# Altium PCB PCB.PcbDoc (part 1 of 2)
Units mm, origin at the board's own origin, x right, y up, seen from the top; angles counter-clockwise.
Board outline 99.99 x 64.99 mm, 4 copper layers (Top Layer 1, Top Layer, Bottom Layer, Bottom Layer 1), stack 1.483 mm thick; 158 components, 106 nets, 655 pads, 492 vias.
Unrouted connection lines stored in the file: 12.
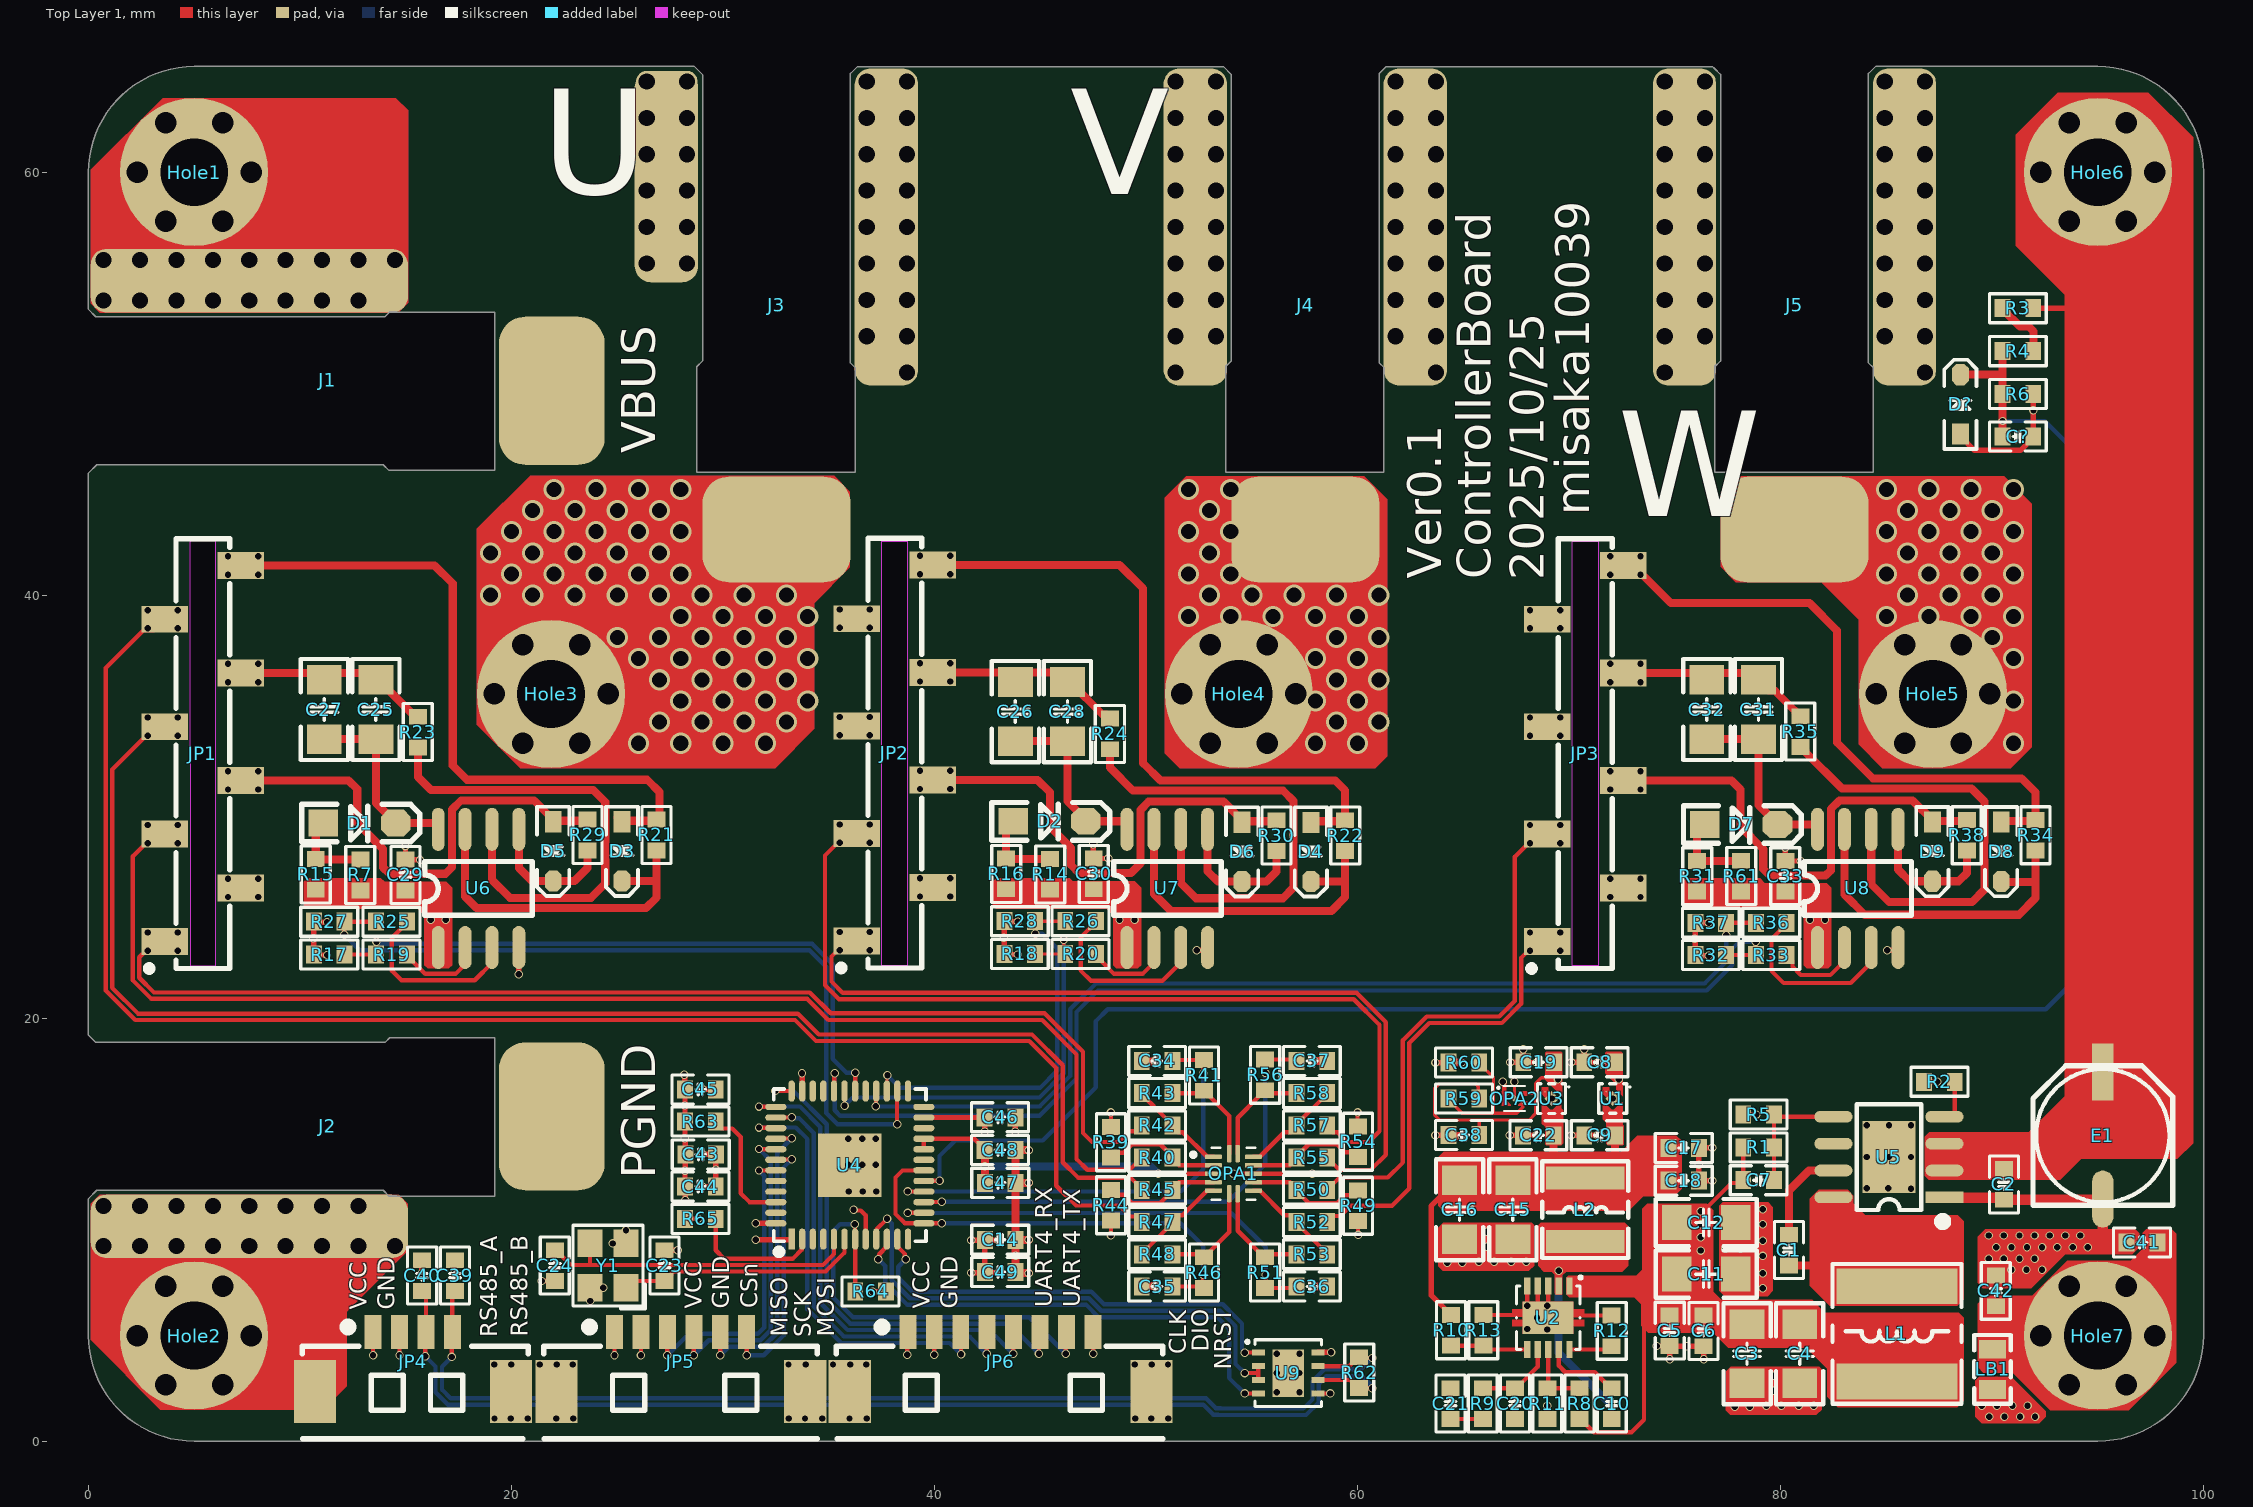
[diagram p0: Top Layer 1 view]
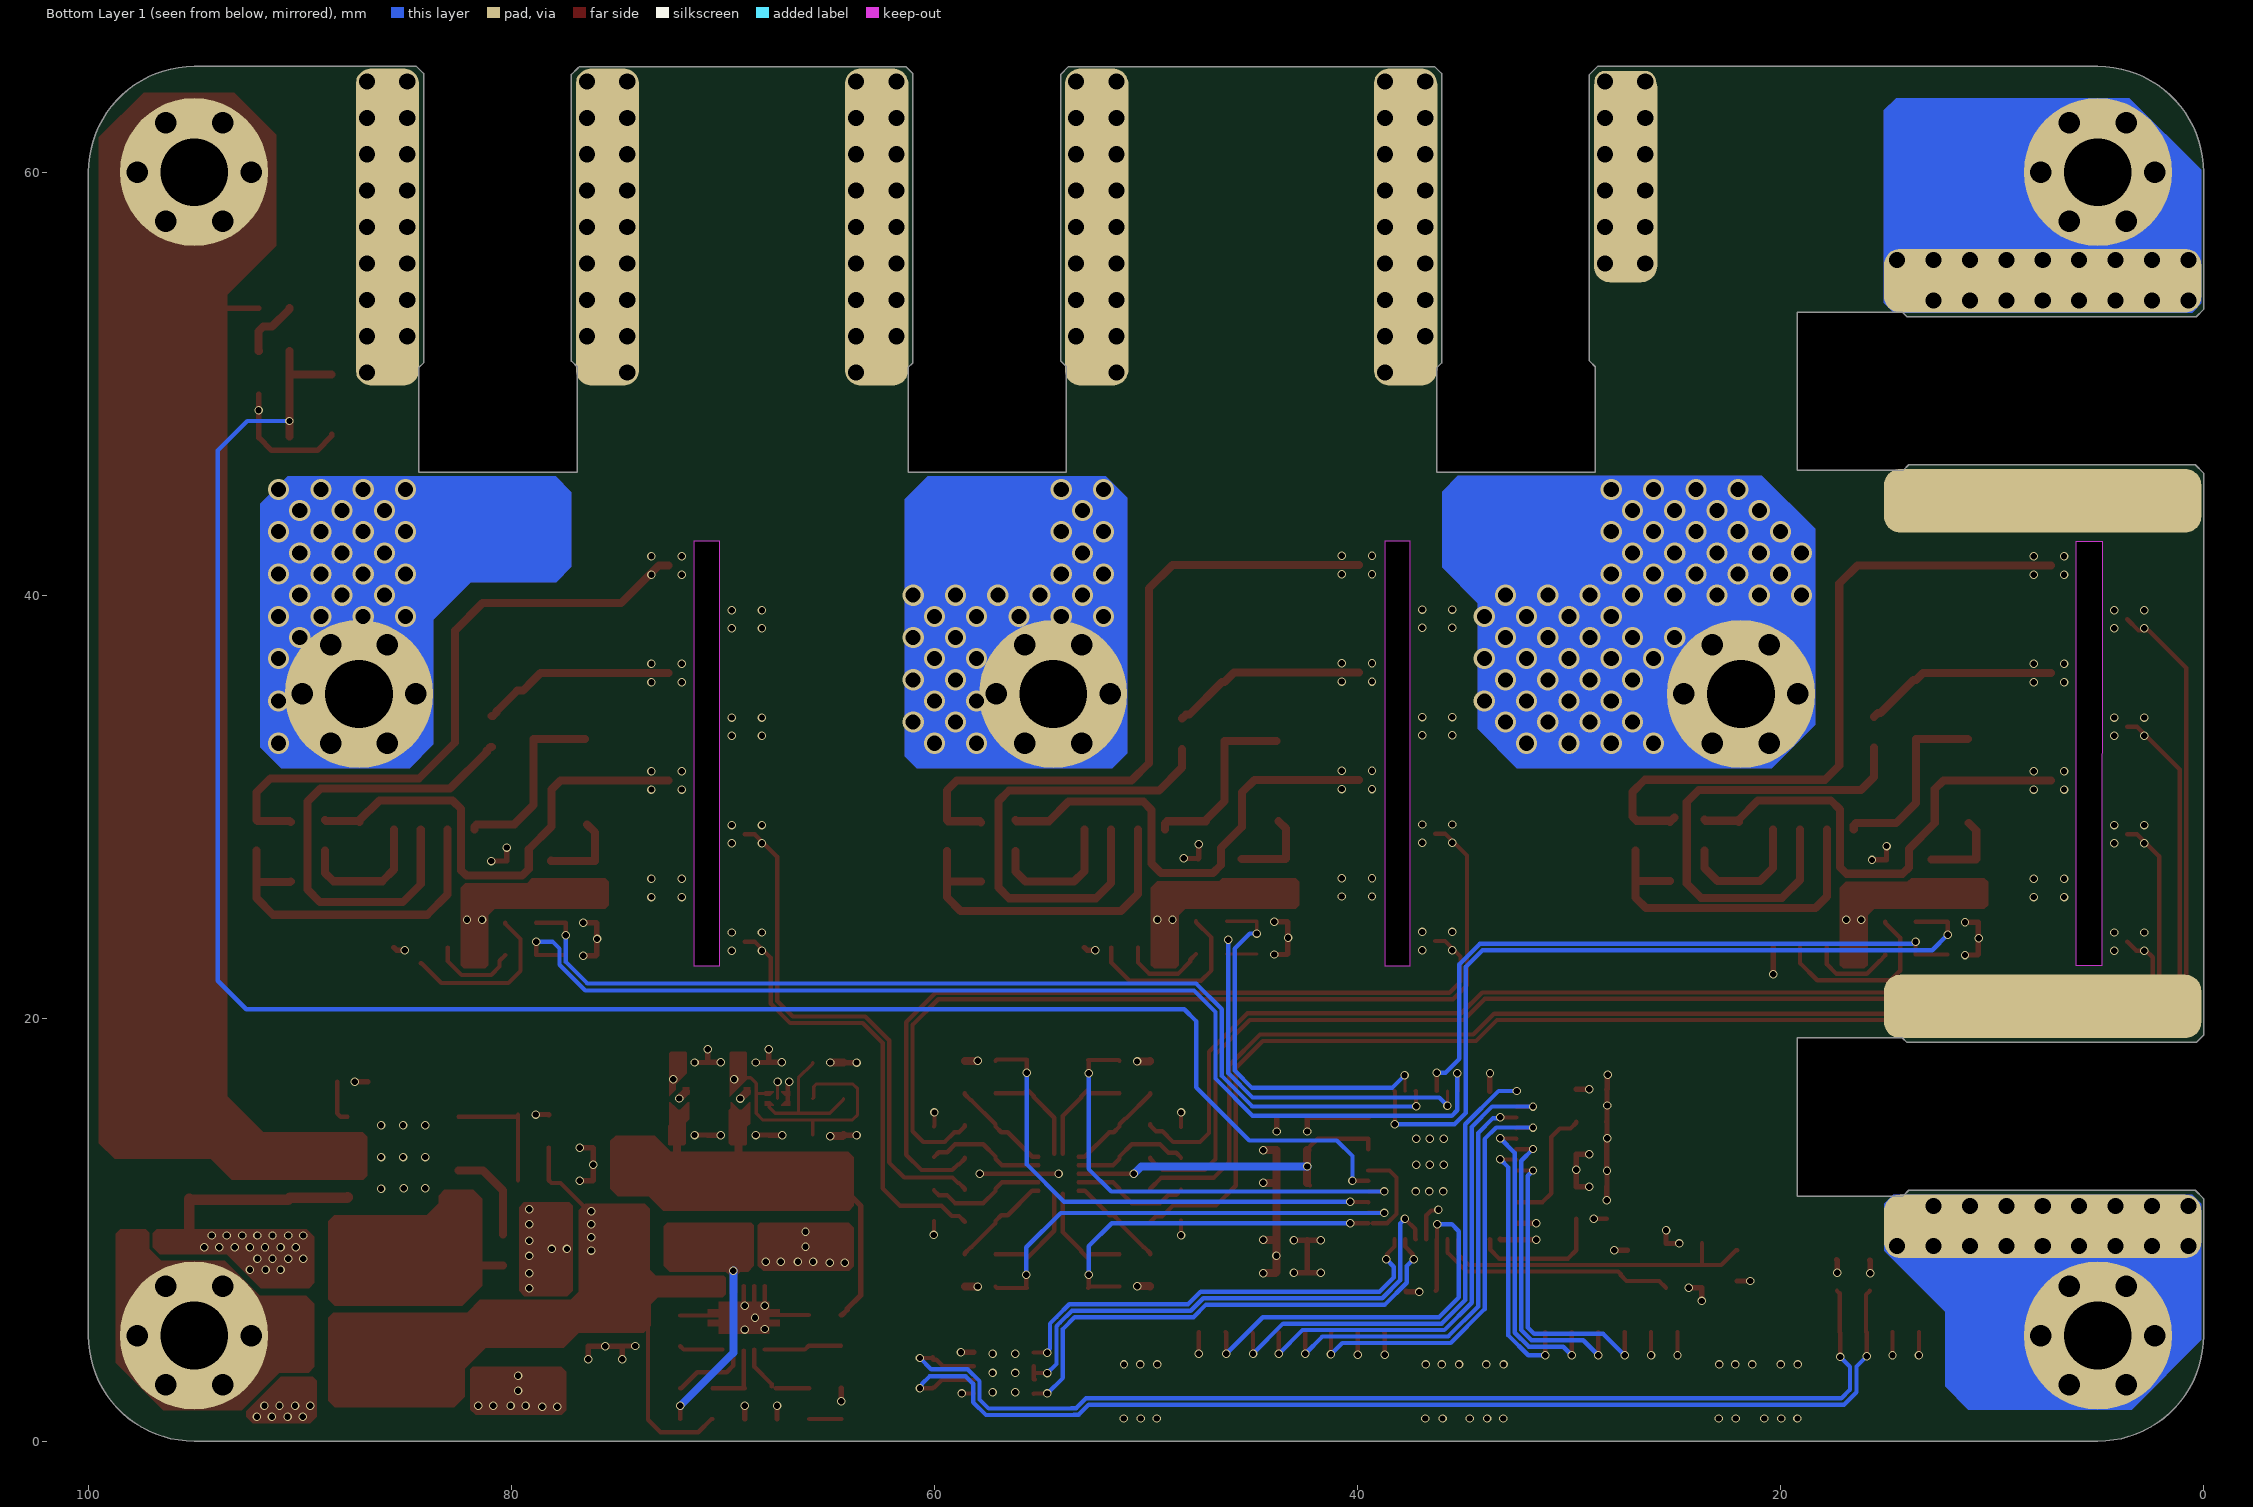
[diagram p1: Bottom Layer 1 view, seen from below]
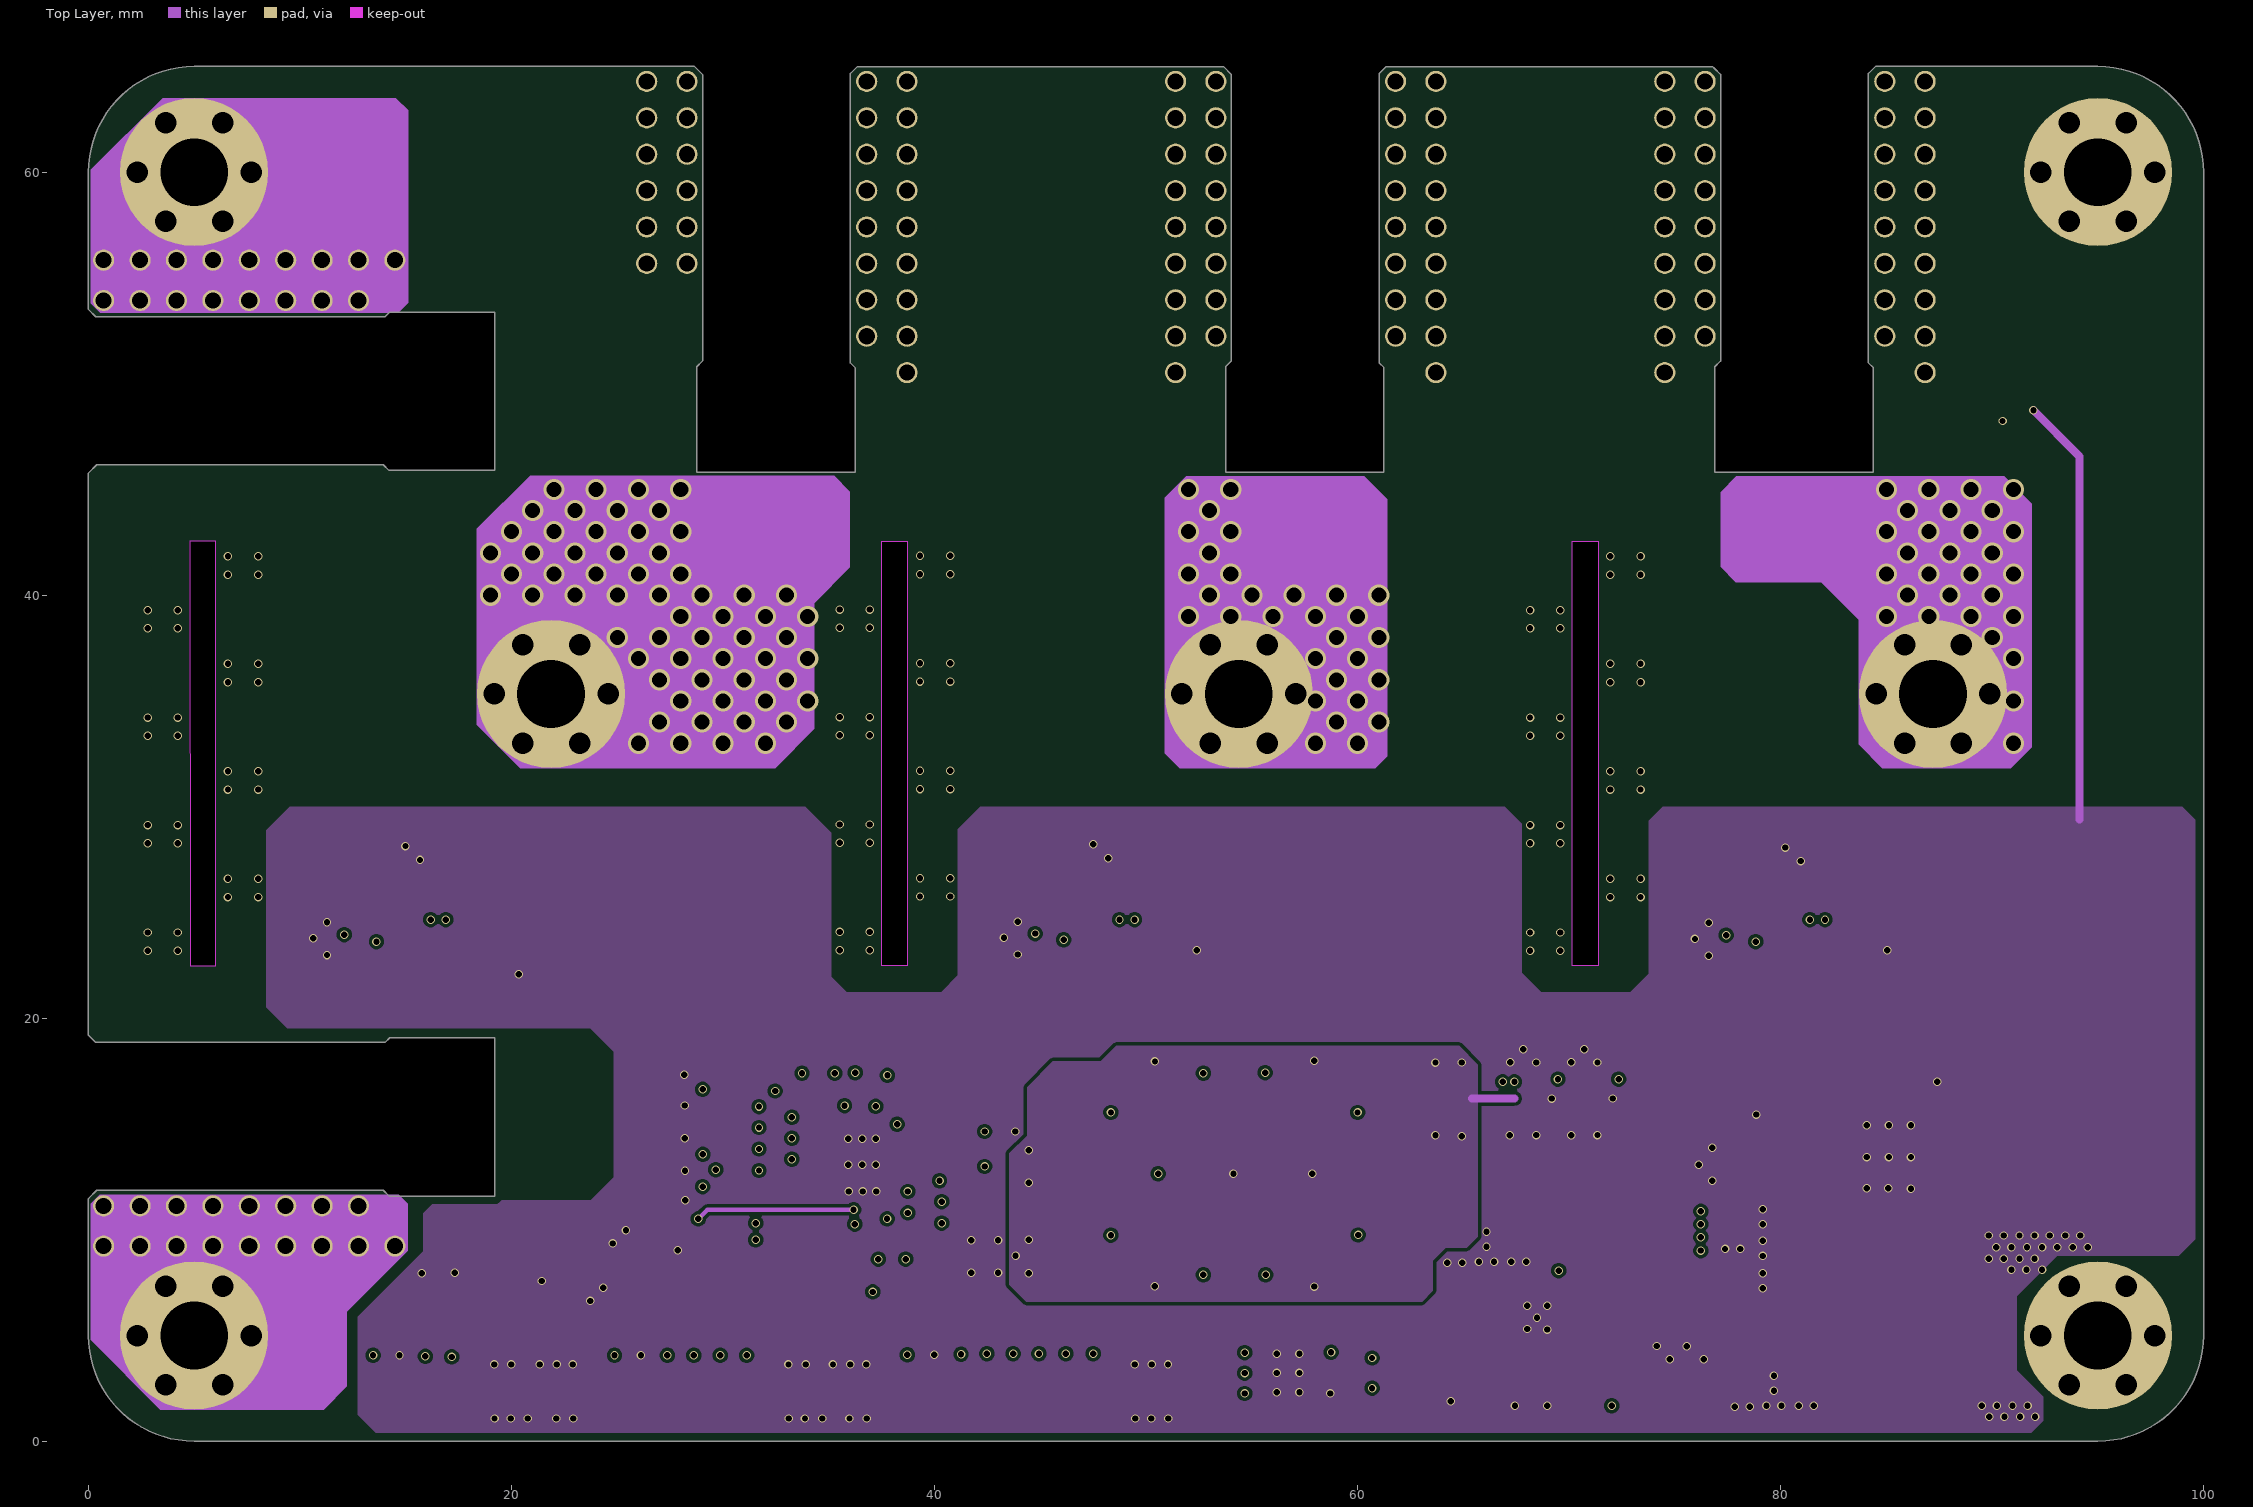
[diagram p2: Top Layer]
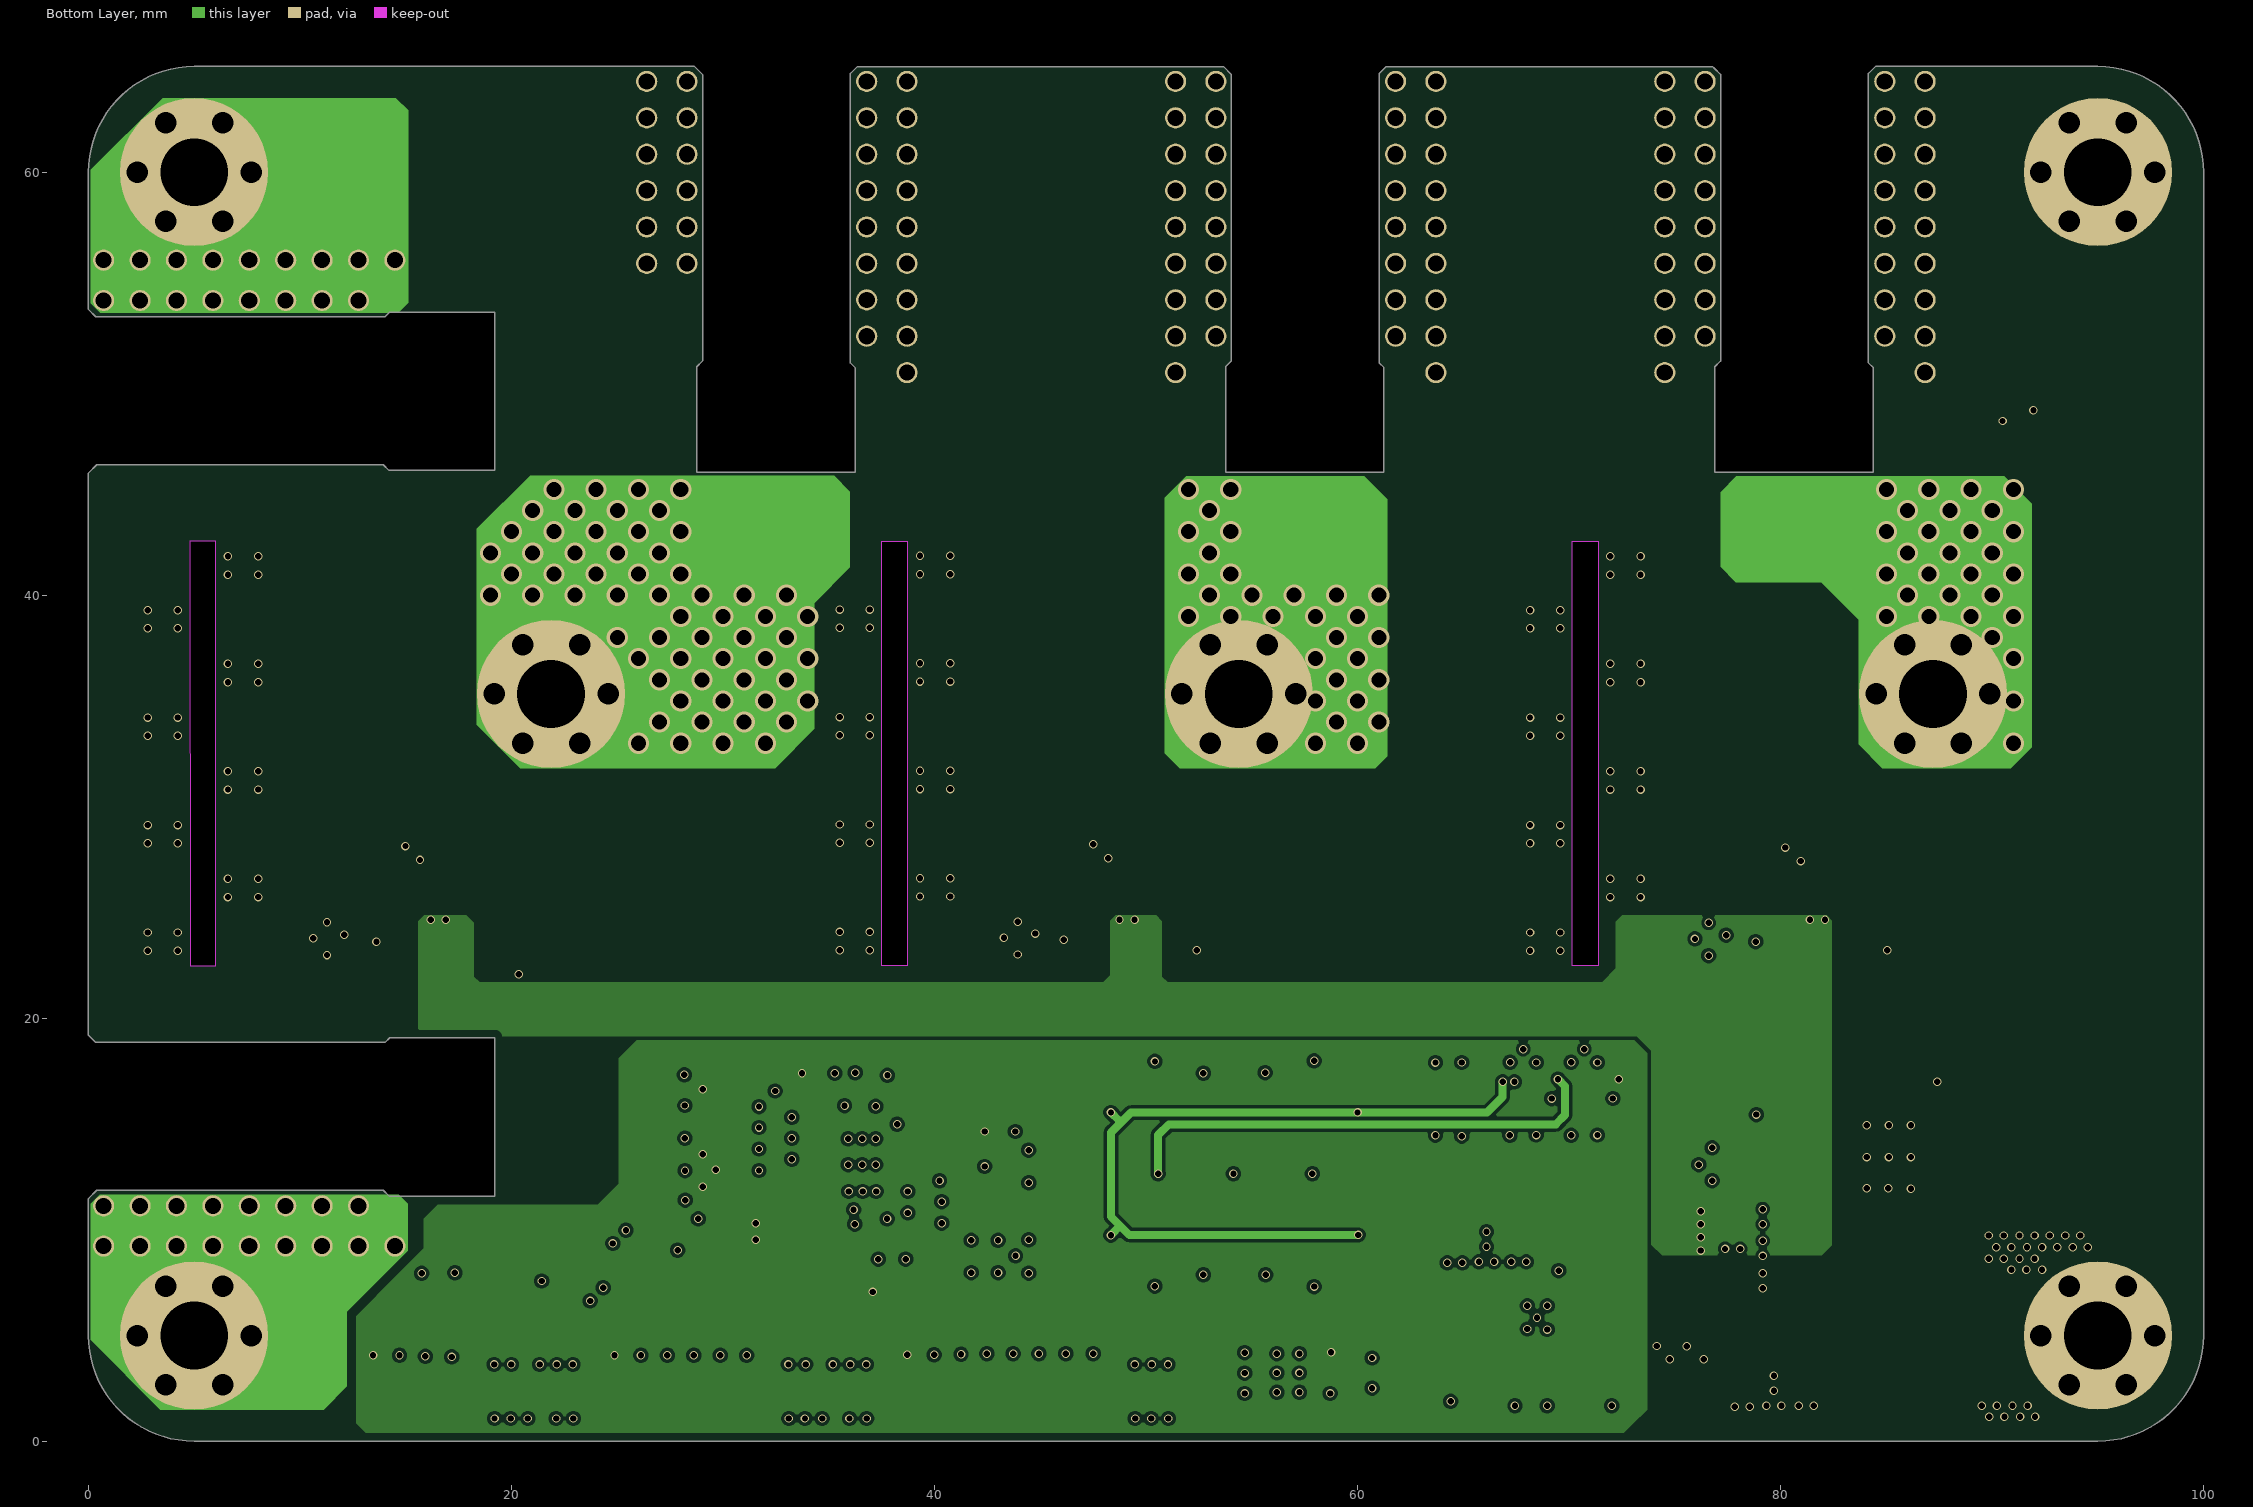
[diagram p3: Bottom Layer]
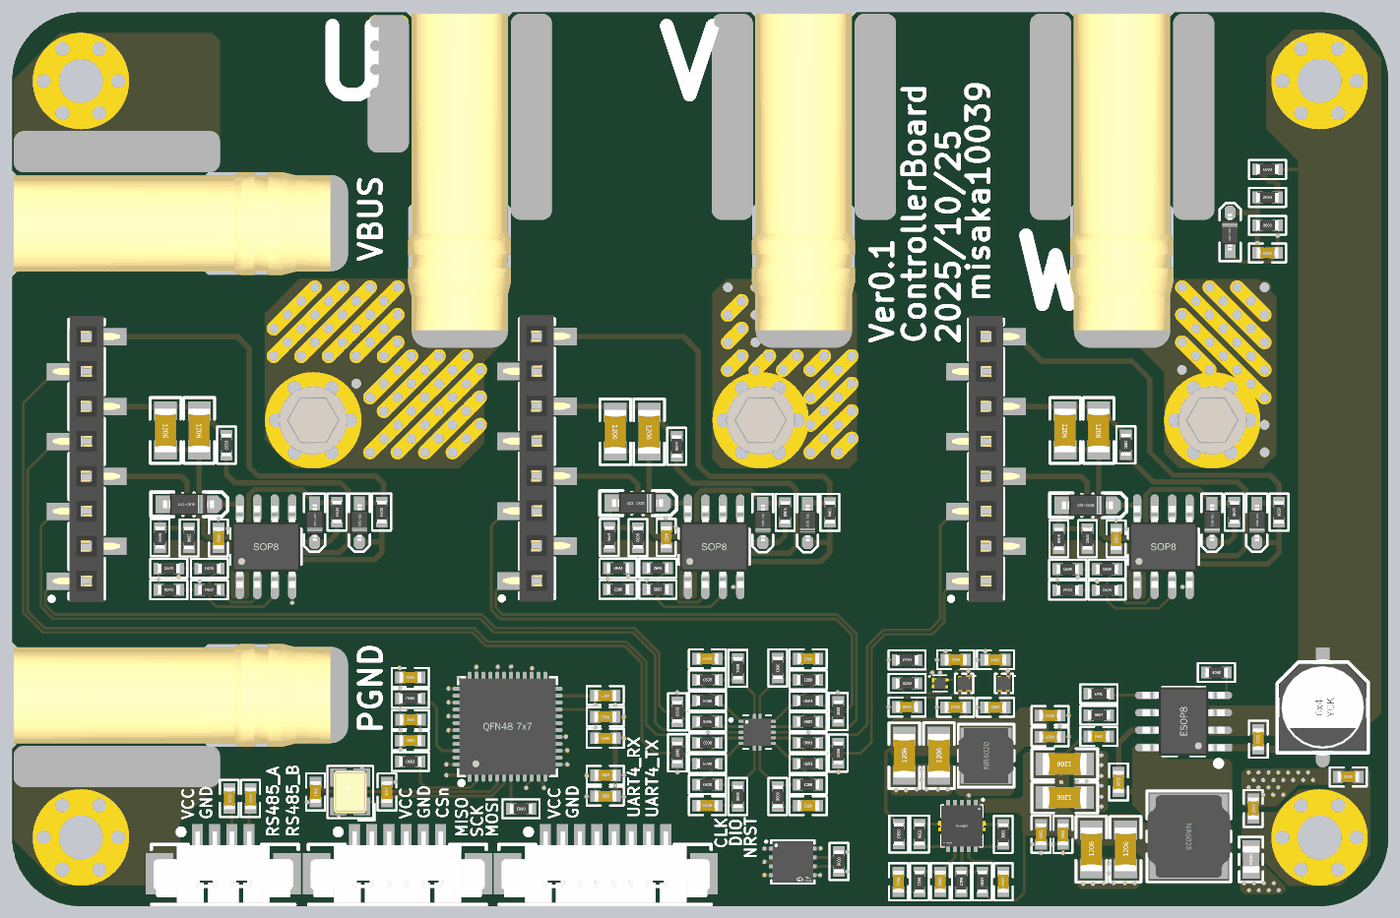
[diagram p5: 3D render of the assembled board from above, using the file's embedded part models]

## Layer stack, top to bottom
Top Solder: solder mask 0.0102, Solder Resist, Dk 3.5
Top Layer 1: signal copper 0.035
Dielectric 2: prepreg 0.0711, PP-006, Dk 4.1
Top Layer: signal copper 0.0356
Dielectric 1: dielectric 1.2, FR-4, Dk 4.8
Bottom Layer: signal copper 0.0356
Dielectric 3: prepreg 0.0711, PP-006, Dk 4.1
Bottom Layer 1: signal copper 0.035
Bottom Solder: solder mask 0.0102, Solder Resist, Dk 3.5

## Board outline
4.994,0.006 cw(c4.994,5) 0,5 0,11.47 0.002,11.475 0.391,11.864 0.396,11.867 13.933,11.867 13.938,11.864 14.211,11.591 19.195,11.591 19.195,19.078 14.245,19.078 14.023,18.856 14.018,18.853 0.349,18.853 0.343,18.857 0.002,19.199 0,19.204 0,45.774 0.002,45.779 0.391,46.168 0.396,46.171 13.933,46.171 13.938,46.168 14.211,45.895 19.195,45.895 19.195,53.382 14.245,53.382 14.023,53.16 14.018,53.157 0.349,53.157 0.343,53.161 0.002,53.503 0,53.508 0,60 cw(c4.994,60) 4.994,64.994 28.645,64.994 28.65,64.992 29.027,64.615 29.03,64.609 29.03,51.073 29.027,51.067 28.755,50.795 28.755,45.811 36.241,45.811 36.241,50.76 36.02,50.982 36.016,50.988 36.016,64.656 36.021,64.662 36.349,64.99 36.353,64.992 53.648,64.992 53.652,64.99 54.028,64.615 54.031,64.609 54.031,51.073 54.028,51.067 53.755,50.795 53.755,45.811 61.242,45.811 61.242,50.76 61.02,50.982 61.017,50.988 61.017,64.656 61.021,64.662 61.349,64.99 61.354,64.992 76.776,64.992 76.86,64.911 77.156,64.615 77.159,64.609 77.159,51.073 77.156,51.067 76.883,50.795 76.883,45.811 84.37,45.811 84.37,50.76 84.148,50.982 84.145,50.988 84.145,64.656 84.149,64.662 84.475,64.989 84.482,64.994 94.994,64.994 cw(c94.994,60) 99.988,60 99.988,5 cw(c94.994,5) 94.994,0.006
cut-out: 70.155,22.479 70.155,42.545 71.374,42.545 71.374,22.479
cut-out: 37.49,22.479 37.49,42.545 38.71,42.545 38.71,22.479
cut-out: 4.801,22.472 6.02,22.472 6.027,22.479 6.027,42.545 6.02,42.552 4.801,42.552 4.794,42.545

## Design rules (kind name [scope] priority, off if disabled: settings)
BoardOutlineClearance [All] p1: gap=0.381 ignorepadtopadclearanceinfootprint=FALSE
Clearance [All] p1: gap=0.152 ignorepadtopadclearanceinfootprint=TRUE except(0: Arc-Text Track-Text SMDPad-Text THPad-Text Via-Text Fill-Text Poly-Text Region-Text Text-Text; 0.102: Arc-Arc Arc-Track Arc-Via Track-Track Track-Via; 0.254: SMDPad-Via THPad-Via Via-Via)
PolygonConnect [All] p1: thpad.connectstyle=Relief thpad.reliefconductorwidth=0.152 thpad.reliefentries=4 thpad.polygonreliefangle="90 Angle" thpad.airgapwidth=0.152 smdpad.connectstyle=Relief smdpad.reliefconductorwidth=0.254 smdpad.reliefentries=4 smdpad.polygonreliefangle="90 Angle" smdpad.airgapwidth=0.254 via.connectstyle=Direct via.reliefconductorwidth=0.254 via.reliefentries=4 via.polygonreliefangle="90 Angle" via.airgapwidth=0.254
RoutingVias [All] p1: holewidth=0.3 width=0.4 viastyle="Through Hole" minholewidth=0.3 minwidth=0.4 maxholewidth=1 maxwidth=1
SolderMaskExpansion [isvia] p1: expansion=0.025 istentingtop=TRUE soldermaskfromhole=TRUE
Width [All] p1: maxlimit=2.54 minlimit=0.102 preferedwidth=0.254
30 further rules are at their usual default settings.

## Classes and differential pairs
component class power: C1 C2 C3 C4 C5 C6 C7 C8 C9 C10 C11 C12 C15 C16 C17 C18 C19 C20 C21 C22 C? D? E1 L1 L2 R1 R2 R3 R4 R5 R6 R8 R9 R10 R11 R12 R13 U1 U2 U3 U5
component class mcu: C14 C23 C24 C34 C35 C36 C37 C38 C39 C40 C43 C44 C45 C46 C47 C48 C49 OPA1 OPA2 R39 R40 R41 R42 R43 R44 R45 R46 R47 R48 R49 R50 R51 R52 R53 R54 R55 R56 R57 R58 R59 R60 R62 R63 R64 R65 U4 U9 Y1
component class driver: C25 C26 C27 C28 C29 C30 C31 C32 C33 D1 D2 D3 D4 D5 D6 D7 D8 D9 R7 R14 R15 R16 R17 R18 R19 R20 R21 R22 R23 R24 R25 R26 R27 R28 R29 R30 R31 R32 R33 R34 R35 R36 R37 R38 R61 U6 U7 U8
component class Connector: C41 C42 Hole1 Hole2 Hole3 Hole4 Hole5 Hole6 Hole7 J1 J2 J3 J4 J5 JP1 JP2 JP3 JP4 JP5 JP6 LB1

## Components (designator, comment, footprint, x,y, rotation, side; value= is the part's Value field where it differs from the comment)
C1 "100nF 100V" C0603_l 80.391,9.042 r90 top
C2 "1nF 100V" C0603_l 90.551,12.141 r90 top
C3 "22uF 35V" C1206_L 78.41,4.14 r90 top
C4 "22uF 35V" C1206_L 80.899,4.14 r90 top
C5 "4.7uF 35V" C0603_l 74.752,5.232 r90 top
C6 "100nF 35V" C0603_l 76.352,5.219 r90 top
C7 "3.3nF 100V" C0603_l 78.955,12.344 r180 top
C8 "4.7uF 16V" C0603_l 71.439,17.919 r180 top
C9 "4.7uF 16V" C0603_l 71.439,14.465 r0 top
C10 "100nF/25V" c0603_l 72.012,1.783 r90 top
C11 "10uF/25V" C1206_l 76.479,7.899 r180 top
C12 "10uF/25V" C1206_l 76.479,10.338 r180 top
C14 "100nF 16V DNP" C0603_L 43.104,9.525 r0 top
C15 "22uF/16V" C1206_l 67.335,10.947 r90 top
C16 "22uF/16V" C1206_l 64.821,10.944 r90 top
C17 "4.7uF/16V" c0603_l 75.413,13.868 r180 top
C18 "100nF/16V" c0603_l 75.413,12.319 r180 top
C19 "4.7uF 16V" C0603_l 68.555,17.919 r180 top
C20 "68pF/25V" c0603_l 67.44,1.783 r90 top
C21 "560pF/25V" c0603_l 64.392,1.783 r270 top
C22 "4.7uF 16V" C0603_l 68.543,14.465 r0 top
C23 "Capacitor" c0603_l 27.229,8.306 r90 top
C24 "Capacitor" c0603_l 22.047,8.306 r270 top
C25 "10uF 35V" C1206_l 13.585,34.595 r270 top
C26 "10uF 35V" C1206_l 43.815,34.496 r270 top
C27 "10uF 35V" C1206_l 11.147,34.595 r270 top
C28 "10uF 35V" C1206_l 46.279,34.496 r270 top
C29 "100nF 35V" C0603_l 14.986,26.772 r270 top
C30 "100nF 35V" C0603_l 47.523,26.822 r270 top
C31 "10uF 35V" C1206_l 78.943,34.595 r270 top
C32 "10uF 35V" C1206_l 76.505,34.595 r270 top
C33 "100nF 35V" C0603_l 80.215,26.709 r270 top
C34 "1nF 6.3V" C0603_L 50.521,17.983 r0 top
C35 "1nF 6.3V" C0603_L 50.521,7.315 r0 top
C36 "1nF 6.3V" C0603_L 57.836,7.315 r180 top
C37 "1nF 6.3V" C0603_L 57.836,17.983 r180 top
C38 "1nF 6.3V" C0603_L 65.024,14.478 r0 top
C39 "1nF 6.3V" C0603_L 17.323,7.837 r90 top
C40 "1nF 6.3V" C0603_L 15.773,7.837 r270 top
C41 "100nF 16V DNP" C0603_L 97.079,9.398 r0 top
C42 "100nF 16V DNP" C0603_L 90.17,7.112 r270 top
C43 "100nF 6.3V" C0603_L 28.942,13.564 r0 top
C44 "100nF 6.3V" C0603_L 28.931,12.04 r0 top
C45 "100nF 6.3V" C0603_L 28.931,16.637 r0 top
C46 "100nF 6.3V" C0603_L 43.092,15.316 r180 top
C47 "4.7uF 6.3V" C0603_L 43.104,12.217 r180 top
C48 "100nF 6.3V" C0603_L 43.092,13.767 r180 top
C49 "100nF 16V DNP" C0603_L 43.104,8.001 r0 top
C? "100nF/16V" c0603_l 91.211,47.498 r180 top
D1 "FR107" SOD-123 12.814,29.224 r0 top
D2 "FR107" SOD-123 45.441,29.312 r0 top
D3 "1N4148" SOD-323 25.222,27.886 r270 top
D4 "1N4148" SOD-323 57.785,27.861 r270 top
D5 "1N4148" SOD-323 21.971,27.886 r270 top
D6 "1N4148" SOD-323 54.534,27.864 r270 top
D7 "FR107" SOD-123 78.133,29.159 r0 top
D8 "1N4148" SOD-323 90.424,27.872 r270 top
D9 "1N4148" SOD-323 87.173,27.875 r270 top
D? "BZT52C3V3S" SOD-323 88.494,49.022 r90 top
E1 "10uF 100V" "CT 6*4 - V" 95.225,14.453 r90 top
Hole1 "M3螺纹孔" M3_3*7载流孔_铜柱 4.994,60 r0 top locked
Hole2 "M3螺纹孔" M3_3*7载流孔_铜柱 4.994,5 r0 top locked
Hole3 "M3螺纹孔" M3_3*7载流孔_螺丝 21.869,35.331 r0 top locked
Hole4 "M3螺纹孔" M3_3*7载流孔_螺丝 54.381,35.331 r0 top locked
Hole5 "M3螺纹孔" M3_3*7载流孔_螺丝 87.198,35.331 r0 top locked
Hole6 "M3螺纹孔" M3_3*7载流孔_铜柱 94.994,60 r0 top locked
Hole7 "M3螺纹孔" M3_3*7载流孔_铜柱 94.994,5 r0 top locked
J1 "XT150母座夹板" "XT150_母座夹板 - VBUS" 21.902,49.664 r0 top locked
J2 "XT150母座夹板" "XT150_母座夹板 - PGND" 21.902,15.36 r0 top locked
J3 "XT150母座夹板" "XT150_母座夹板 - duplicate" 32.523,43.104 r270 top locked
J4 "XT150母座夹板" XT150_母座夹板 57.524,43.104 r270 top locked
J5 "XT150母座夹板" XT150_母座夹板 80.652,43.104 r270 top locked
JP1 "HDR-1X8" 贴片排母2.54mm_交错_8P 3.607,23.622 r90 top locked
JP2 "HDR-1X8" 贴片排母2.54mm_交错_8P 36.322,23.647 r90 top locked
JP3 "HDR-1X8" 贴片排母2.54mm_交错_8P 68.961,23.622 r90 top locked
JP4 "HDR-1X4" "MX 1.25-WS-4P" 15.342,2.355 r0 top
JP5 "HDR-1X6" "MX 1.25-WS-6P" 28.005,2.355 r0 top
JP6 "HDR-1X8" "MX 1.25-WS-8P" 43.124,2.355 r0 top
L1 "33uH" NR6028 85.496,5.08 r270 top
L2 "8.2uH" NR4020 70.764,10.947 r90 top
LB1 "500R@100MHz" "FB 0805_L" 90.018,3.404 r270 top
OPA1 "TLV9064 RUC" "TLV9064 RUC" 54.127,12.649 r0 top
OPA2 "TLV9061 DPW" X2SON-4_L0.8-W0.8-P0.48-TL-DPW 67.412,16.205 r0 top
R1 "90K 1%" r0603_l 78.955,13.894 r0 top
R2 "60K 1%" r0603_l 87.503,16.993 r180 top
R3 "150K 1%" r0603_l 91.211,53.569 r180 top
R4 "150K 1%" r0603_l 91.211,51.537 r180 top
R5 "10K 1%" r0603_l 78.955,15.443 r180 top
R6 "10K 1%" r0603_l 91.211,49.505 r0 top
R7 "10R 1%" R0603_l 12.852,26.772 r90 top
R8 "1K 1%" r0603_l 70.488,1.783 r90 top
R9 "18.7K 1%" r0603_l 65.916,1.783 r270 top
R10 "100K 1%" r0603_l 64.414,5.246 r270 top
R11 "1K 1%" r0603_l 68.964,1.783 r270 top
R12 "1K 1%" r0603_l 72.009,5.221 r90 top
R13 "19.1K 1%" r0603_l 65.938,5.246 r90 top
R14 "10R 1%" R0603_l 45.466,26.797 r90 top
R15 "10R 1%" r0603_l 10.744,26.797 r90 top
R16 "10R 1%" r0603_l 43.383,26.822 r90 top
R17 "10K 1%" r0603_l 11.379,23.012 r180 top
R18 "10K 1%" r0603_l 44.03,23.038 r180 top
R19 "100R 1%" r0603_l 14.326,23.012 r0 top
R20 "100R 1%" r0603_l 46.902,23.038 r0 top
R21 "22R 1%" r0603_l 26.848,28.663 r90 top
R22 "22R 1%" r0603_l 59.411,28.637 r90 top
R23 "5.1R 1%" r0603_l 15.57,33.528 r90 top
R24 "5.1R 1%" r0603_l 48.285,33.44 r90 top
R25 "100R 1%" r0603_l 14.326,24.562 r0 top
R26 "100R 1%" r0603_l 46.902,24.587 r0 top
R27 "10K 1%" r0603_l 11.379,24.562 r0 top
R28 "10K 1%" r0603_l 44.03,24.587 r0 top
R29 "22R 1%" r0603_l 23.597,28.663 r90 top
R30 "22R 1%" r0603_l 56.159,28.637 r90 top
R31 "10R 1%" r0603_l 76.05,26.709 r90 top
R32 "10K 1%" r0603_l 76.696,22.987 r180 top
R33 "100R 1%" r0603_l 79.555,22.987 r0 top
R34 "22R 1%" r0603_l 92.05,28.649 r90 top
R35 "5.1R 1%" r0603_l 80.924,33.553 r90 top
R36 "100R 1%" r0603_l 79.555,24.511 r0 top
R37 "10K 1%" r0603_l 76.696,24.511 r0 top
R38 "22R 1%" r0603_l 88.798,28.649 r90 top
R39 "80K 1%" R0603_l 48.336,14.136 r90 top
R40 "1K 1%" R0603_l 50.521,13.411 r180 top
R41 "22R 1%" R0603_l 52.73,17.297 r270 top
R42 "1K 1%" R0603_l 50.521,14.935 r180 top
R43 "80K 1%" R0603_l 50.521,16.459 r0 top
R44 "80K 1%" R0603_l 48.336,11.162 r270 top
R45 "1K 1%" R0603_l 50.521,11.887 r180 top
R46 "22R 1%" R0603_l 52.73,7.976 r90 top
R47 "1K 1%" R0603_l 50.521,10.363 r180 top
R48 "80K 1%" R0603_l 50.521,8.839 r0 top
R49 "80K 1%" R0603_l 60.02,11.137 r270 top
R50 "1K 1%" R0603_l 57.836,11.887 r0 top
R51 "22R 1%" R0603_l 55.626,7.976 r90 top
R52 "1K 1%" R0603_l 57.836,10.363 r0 top
R53 "80K 1%" R0603_l 57.836,8.839 r180 top
R54 "80K 1%" R0603_l 60.02,14.162 r90 top
R55 "1K 1%" R0603_l 57.836,13.411 r0 top
R56 "22R 1%" R0603_l 55.626,17.323 r270 top
R57 "1K 1%" R0603_l 57.836,14.935 r0 top
R58 "80K 1%" R0603_l 57.836,16.459 r180 top
R59 "20K 1%" R0603_l 65.024,16.205 r180 top
R60 "20K 1%" R0603_l 65.024,17.907 r180 top
R61 "10R 1%" R0603_l 78.13,26.721 r90 top
R62 "120R 1%" R0603_l 60.071,3.251 r90 top
R63 "10K 1%" R0603_l 28.931,15.113 r0 top
R64 "10K 1%" R0603_l 36.971,7.087 r180 top
R65 "0R 1%" R0603_l 28.931,10.516 r0 top
U1 "TP132C33D4_X2SON" ZQFN-4L_L1.0-W1.0-P0.63-BL-EP 72.06,16.205 r180 top
U2 "TPS54335A-QFN" VSON-10_L3.0-W3.0-P0.50-TL-EP 69.012,5.839 r270 top
U3 "LP5907_X2SON" ZQFN-4L_L1.0-W1.0-P0.63-BL-EP 69.169,16.203 r180 top
U4 "STM32G431CBUx" "QFN48 7X7_M" 35.992,13.056 r0 top
U5 "KP521001" ESOP8_N 85.115,13.437 r180 top
U6 "EG3112" SOP-8 18.44,26.137 r90 top
U7 "EG3112" SOP-8 51.003,26.137 r90 top
U8 "EG3112" SOP-8 83.644,26.137 r90 top
U9 "SIT3088E" DFN-8_L3.0-W3.0-P0.65-BL-EP 56.718,3.226 r270 top
Y1 "8Mhz" "OSC 3225-4P" 24.562,8.306 r90 top

## Footprints (in the part's own frame and the unit in brackets; to place one, negate y for a bottom-side part, rotate by r counter-clockwise, add the part's x,y. Pads: shape width x height; smd on the part's side, far side on the other; paste and mask are expansions set on the pad)
C0603_l [mm] "贴片MLCC电容"
  rect 0.75x0.85 smd: 1(-0.725,0) 2(0.725,0)
  silkscreen extent -1.35,-0.69 1.35,0.69, body extent -0.8,-0.4 0.8,0.4, height 0.8
c0603_l [mm] "贴片MLCC电容"
  rect 0.75x0.85 smd: 1(-0.725,0) 2(0.725,0)
  silkscreen extent -1.35,-0.69 1.35,0.69, body extent -0.8,-0.4 0.8,0.4, height 0.8
C0603_L [mm] "贴片MLCC电容"
  rect 0.75x0.85 smd: 1(-0.725,0) 2(0.725,0)
  silkscreen extent -1.35,-0.69 1.35,0.69, body extent -0.8,-0.4 0.8,0.4, height 0.8
C1206_L [mm] "贴片MLCC电容"
  rect 1.4x1.65 smd: 1(-1.4,0) 2(1.4,0)
  silkscreen extent -2.39,-1.12 2.39,1.12, body extent -1.6,-0.8 1.6,0.8, height 1.1
C1206_l [mm] "贴片MLCC电容"
  rect 1.4x1.65 smd: 1(-1.4,0) 2(1.4,0)
  silkscreen extent -2.39,-1.12 2.39,1.12, body extent -1.6,-0.8 1.6,0.8, height 1.1
"CT 6*4 - V" [mm] "直径6mm，高4mm"
  rect 2.7x1 smd: 1(3,0)
  oval 2.7x1 smd: 2(-3,0)
  silkscreen extent -3.3,-3.3 3.3,3.3, body extent -3.5,-3.15 3.5,3.15, height 4
DFN-8_L3.0-W3.0-P0.65-BL-EP [mm]
  rect 0.28x0.625 smd: 1(-0.975,-1.412) 2(-0.325,-1.412) 3(0.325,-1.412) 4(0.975,-1.412) 5(0.975,1.412) 6(0.325,1.412) 7(-0.325,1.412) 8(-0.975,1.412)
  rect 2.25x1.5 smd: 9(0,0)
  silkscreen extent -1.58,-2.01 1.58,1.58, body extent -1.5,-1.51 1.5,1.51, height 0.92
ESOP8_N [mm] "5*6*1.8mm（长宽高）"
  rect 1.8x0.55 smd: 1(-2.625,1.905)
  oval 1.8x0.55 smd: 2(-2.625,0.635) 3(-2.625,-0.635) 4(-2.625,-1.905) 5(2.625,-1.905) 6(2.625,-0.635) 7(2.625,0.635) 8(2.625,1.905)
  rect 2.5x3.4 smd paste-2: 9(0,0)
  rect 0.9x0.7 on Top Paste: 10(-0.625,1.1) 10(-0.625,0) 10(-0.625,-1.1) 11(0.65,1.1) 11(0.65,0) 11(0.65,-1.1)
  silkscreen extent -2.69,-2.5 1.52,3.2, body extent -3,-2.5 3,2.5, height 1.53
"FB 0805_L" [mil] "小功率贴片磁珠"
  rect 35x50 smd: 1(-37.4,0) 2(37.4,0)
  silkscreen extent -64,-34 64,34, body extent -39,-24 39,24, height 35
M3_3*7载流孔_螺丝 [mil] "双面焊盘增加接触面积"
  round 40 hole 40: 1(-106,0) 1(-53,-91.8) 1(-53,91.8) 1(53,-91.8) 1(53,91.8) 1(106,0)
  round 275.59 hole 125.98: 1(0,0)
  body extent -137,-138 137,138, height 150
M3_3*7载流孔_铜柱 [mil] "双面焊盘增加接触面积"
  round 40 hole 40: 1(-106,0) 1(-53,-91.8) 1(-53,91.8) 1(53,-91.8) 1(53,91.8) 1(106,0)
  round 275.59 hole 125.98: 1(0,0)
  body extent -137,-138 137,138, height 228
"MX 1.25-WS-4P" [mm] "长：10.15mm，宽：4.2mm，高：3.4mm"
  rect 2x3 smd: 0(-4.632,0) 0(4.632,0)
  rect 0.8x1.6 smd: 1(-1.889,2.811) 2(-0.639,2.811) 3(0.611,2.811) 4(1.861,2.811)
  silkscreen extent -5.23,-2.23 5.45,3.25, body extent -5.07,-2.1 5.07,3.09, height 3.4
"MX 1.25-WS-6P" [mm] "长：12.65mm，宽：4.2mm，高：3.4mm"
  rect 2x3 smd: 0(-5.882,0) 0(5.882,0)
  rect 0.8x1.6 smd: 1(-3.139,2.811) 2(-1.889,2.811) 3(-0.639,2.811) 4(0.611,2.811) 5(1.861,2.811) 6(3.111,2.811)
  silkscreen extent -6.48,-2.23 6.45,3.25, body extent -6.32,-2.1 6.32,3.09, height 3.4
"MX 1.25-WS-8P" [mm] "长：15.15mm，宽：4.2mm，高：3.4mm"
  rect 2x3 smd: 0(-7.132,0) 0(7.132,0)
  rect 0.8x1.6 smd: 1(-4.389,2.811) 2(-3.139,2.811) 3(-1.889,2.811) 4(-0.639,2.811) 5(0.611,2.811) 6(1.861,2.811) 7(3.111,2.811) 8(4.361,2.811)
  silkscreen extent -7.77,-2.23 7.67,3.25, body extent -7.57,-2.1 7.57,3.09, height 3.4
NR4020 [mm] "4.0mm*4.0mm*2.0mm(长*宽*高）"
  rect 1.1x3.7 smd: 1(-1.5,0) 2(1.5,0)
  silkscreen extent -2.29,-2.03 2.29,2.03, body extent -2,-2 2,2, height 2.1
NR6028 [mm] "6.0mm*6.0mm*2.8mm(长*宽*高）"
  rect 1.7x5.7 smd: 1(-2.25,0) 2(2.25,0)
  silkscreen extent -3.3,-3.05 3.3,3.05, body extent -3,-3 3,3, height 2.9
"OSC 3225-4P" [mm] "3.2*2.5*0.7mm(长宽高)"
  rect 1.3x1.2 smd: 1(-1.05,-0.85) 2(1.05,-0.85) 3(1.05,0.85) 4(-1.05,0.85)
  silkscreen extent -2.03,-1.75 1.91,1.65, body extent -1.6,-1.25 1.6,1.25, height 0.7
"QFN48 7X7_M" [mm] "48脚，长x宽x高：7x7x1mm，脚距：0.5mm"
  rect 0.3x1 smd: 1(-2.75,-3.5)
  oval 0.3x1 smd: 2(-2.25,-3.5) 3(-1.75,-3.5) 4(-1.25,-3.5) 5(-0.75,-3.5) 6(-0.25,-3.5) 7(0.25,-3.5) 8(0.75,-3.5) 9(1.25,-3.5) 10(1.75,-3.5) 11(2.25,-3.5) 12(2.75,-3.5) 25(2.75,3.5) 26(2.25,3.5) 27(1.75,3.5) 28(1.25,3.5) 29(0.75,3.5) 30(0.25,3.5) 31(-0.25,3.5) 32(-0.75,3.5) 33(-1.25,3.5) 34(-1.75,3.5) 35(-2.25,3.5) 36(-2.75,3.5)
  oval 1x0.3 smd: 13(3.5,-2.75) 14(3.5,-2.25) 15(3.5,-1.75) 16(3.5,-1.25) 17(3.5,-0.75) 18(3.5,-0.25) 19(3.5,0.25) 20(3.5,0.75) 21(3.5,1.25) 22(3.5,1.75) 23(3.5,2.25) 24(3.5,2.75) 37(-3.5,2.75) 38(-3.5,2.25) 39(-3.5,1.75) 40(-3.5,1.25) 41(-3.5,0.75) 42(-3.5,0.25) 43(-3.5,-0.25) 44(-3.5,-0.75) 45(-3.5,-1.25) 46(-3.5,-1.75) 47(-3.5,-2.25) 48(-3.5,-2.75)
  rect 3x3 smd mask+0.051: 49(0,0)
  silkscreen extent -3.6,-4.25 3.6,3.6, body extent -3.51,-3.51 3.51,3.51, height 0.95
r0603_l [mm] "1/10W贴片电阻"
  rect 0.75x0.85 smd: 1(-0.725,0) 2(0.725,0)
  silkscreen extent -1.35,-0.69 1.35,0.69, body extent -0.8,-0.4 0.8,0.4, height 0.4
R0603_l [mm] "1/10W贴片电阻"
  rect 0.75x0.85 smd: 1(-0.725,0) 2(0.725,0)
  silkscreen extent -1.35,-0.69 1.35,0.69, body extent -0.8,-0.4 0.8,0.4, height 0.4
SOD-123 [mil] "2.7x1.6X1.1mm（长宽高，不包括引脚）"
  rect 55x50 smd: 1(-67.5,0)
  oct 55x50 smd: 2(67.5,0)
  silkscreen extent -108,-35 112,35, body extent -73,-31 73,31, height 48
SOD-323 [mm] "1.8x1.3X0.9mm（长宽高，不包括引脚）"
  rect 1x0.8 smd: 1(-1.4,0)
  oct 1x0.8 smd: 2(1.4,0)
  silkscreen extent -2.11,-0.76 2.11,0.76, body extent -1.34,-0.63 1.31,0.67, height 1
SOP-8 [mil] "封装库来自淘宝卖家 ID：黄晶宝石"
  oval 80x24 smd: 1(-110,75) 2(-110,25) 3(-110,-25) 4(-110,-75) 5(110,-75) 6(110,-25) 7(110,25) 8(110,75)
  silkscreen extent -50,-100 50,100, body extent -118,-98 118,98, height 75
"TLV9064 RUC" [mm] "TLV9064 RUC"
  rrect50% 0.81x0.22 smd: 1(-0.945,0.8) 2(-0.945,0.4) 3(-0.945,0) 4(-0.945,-0.4) 5(-0.945,-0.8) 8(0.945,-0.8) 9(0.945,-0.4) 10(0.945,0) 11(0.945,0.4) 12(0.945,0.8)
  rrect50% 0.22x0.81 smd: 6(-0.2,-0.945) 7(0.2,-0.945) 13(0.2,0.945) 14(-0.2,0.945)
  silkscreen extent -2,-1.22 1.03,1.22, body extent -1,-1 1,1, height 0.4
VSON-10_L3.0-W3.0-P0.50-TL-EP [mm]
  rect 0.8x0.3 smd: 1(-1.5,1) 2(-1.5,0.5) 3(-1.5,0) 4(-1.5,-0.5) 5(-1.5,-1) 6(1.5,-1) 7(1.5,-0.5) 8(1.5,0) 9(1.5,0.5) 10(1.5,1)
  rect 1.52x2.4 smd: 11(0.002,-0.009)
  Top Layer 1 region: -0.758,1.191 -0.398,1.191 -0.398,1.706 -0.098,1.706 -0.098,1.191 0.102,1.191 0.102,1.706 0.402,1.706 0.402,1.191 0.761,1.191 0.761,-1.209 0.402,-1.209 0.402,-1.714 0.102,-1.714 0.102,-1.209 -0.098,-1.209 -0.098,-1.714 -0.398,-1.714 -0.398,-1.209 -0.759,-1.209 -0.759,0.886 -0.758,0.886 -0.758,1.191
  silkscreen extent -1.98,-1.5 1.5,1.6, body extent -1.51,-1.52 1.51,1.5, height 0.61
X2SON-4_L0.8-W0.8-P0.48-TL-DPW [mm]
  round 0.044 smd: 1(-0.39,0.24) 2(-0.39,-0.24) 4(0.39,-0.24) 5(0.39,0.24)
  rect 0.25x0.25 smd rot 45 mask-2539.97: 3(0,0)
  Top Layer 1 region: 0.34,0.13 0.18,0.29 0.18,0.35 0.6,0.35 0.6,0.13 0.34,0.13
  Top Layer 1 region: 0.34,-0.13 0.18,-0.29 0.18,-0.35 0.6,-0.35 0.6,-0.13 0.34,-0.13
  Top Layer 1 region: -0.34,0.13 -0.18,0.29 -0.18,0.35 -0.6,0.35 -0.6,0.13 -0.34,0.13
  Top Layer 1 region: -0.34,-0.13 -0.18,-0.29 -0.18,-0.35 -0.6,-0.35 -0.6,-0.13 -0.34,-0.13
  silkscreen extent -0.81,-0.58 0.51,0.58, body extent -0.4,-0.4 0.4,0.4, height 0.4
XT150_母座夹板 [mm] "XT150_母座夹板"
  round 1 hole 0.762: 1(-21.184,4.267) 1(-21.184,6.172) 1(-21.184,-6.133) 1(-21.184,-4.228) 1(-19.463,4.267) 1(-19.463,6.172) 1(-19.463,-6.133) 1(-19.463,-4.228) 1(-17.742,4.267) 1(-17.742,6.172) 1(-17.742,-6.133) 1(-17.742,-4.228) 1(-16.021,4.267) 1(-16.021,6.172) 1(-16.021,-6.133) 1(-16.021,-4.228) 1(-14.3,4.267) 1(-14.3,6.172) 1(-14.3,-6.133) 1(-14.3,-4.228) 1(-12.579,4.267) 1(-12.579,6.172) 1(-12.579,-6.133) 1(-12.579,-4.228) 1(-10.859,4.267) 1(-10.859,6.172) 1(-10.858,-6.133) 1(-10.858,-4.228) 1(-9.138,4.267) 1(-9.138,6.172) 1(-9.138,-6.133) 1(-9.138,-4.228) 1(-7.417,6.172) 1(-7.417,-6.133)
  rrect50% 15x3 smd: 1(-14.3,5.2) 1(-14.3,-5.2)
  rrect50% 15x3 smd far side: 1(-14.3,5.2) 1(-14.3,-5.2)
  round 0 all layers, no hole: 1(-7.417,4.267) 1(-7.417,-4.228)
  rrect50% 5x7 smd: 1(0,0)
  body extent -21.78,-3.78 1.22,3.72, height 3.75
"XT150_母座夹板 - duplicate" [mm] "XT150_母座夹板"
  round 1 hole 0.762: 1(-21.184,4.267) 1(-21.184,6.172) 1(-21.184,-6.133) 1(-21.184,-4.228) 1(-19.463,4.267) 1(-19.463,6.172) 1(-19.463,-6.133) 1(-19.463,-4.228) 1(-17.742,4.267) 1(-17.742,6.172) 1(-17.742,-6.133) 1(-17.742,-4.228) 1(-16.021,4.267) 1(-16.021,6.172) 1(-16.021,-6.133) 1(-16.021,-4.228) 1(-14.3,4.267) 1(-14.3,6.172) 1(-14.3,-6.133) 1(-14.3,-4.228) 1(-12.579,4.267) 1(-12.579,6.172) 1(-12.579,-6.133) 1(-12.579,-4.228) 1(-10.859,4.267) 1(-10.859,6.172) 1(-9.138,4.267) 1(-9.138,6.172) 1(-7.417,6.172)
  rrect50% 10x3 smd: 1(-16.688,-5.2)
  rrect50% 10x3 smd far side: 1(-16.688,-5.2)
  rrect50% 15x3 smd: 1(-14.3,5.2)
  rrect50% 15x3 smd far side: 1(-14.3,5.2)
  round 0 all layers, no hole: 1(-7.417,4.267)
  rrect50% 5x7 smd: 1(0,0)
  body extent -21.78,-3.78 1.22,3.72, height 3.75
"XT150_母座夹板 - PGND" [mm] "XT150_母座夹板"
  round 1 hole 0.762: 1(-21.184,-6.133) 1(-21.184,-4.228) 1(-19.463,-6.133) 1(-19.463,-4.228) 1(-17.742,-6.133) 1(-17.742,-4.228) 1(-16.021,-6.133) 1(-16.021,-4.228) 1(-14.3,-6.133) 1(-14.3,-4.228) 1(-12.579,-6.133) 1(-12.579,-4.228) 1(-10.858,-6.133) 1(-10.858,-4.228) 1(-9.138,-6.133) 1(-9.138,-4.228) 1(-7.417,-6.133)
  rrect50% 15x3 smd far side: 1(-14.3,5.2) 1(-14.3,-5.2)
  rrect50% 15x3 smd: 1(-14.3,-5.2)
  round 0 all layers, no hole: 1(-7.417,-4.228)
  rrect50% 5x7 smd: 1(0,0)
  body extent -21.78,-3.78 1.22,3.72, height 3.75
"XT150_母座夹板 - VBUS" [mm] "XT150_母座夹板"
  round 1 hole 0.762: 1(-21.184,4.267) 1(-21.184,6.172) 1(-19.463,4.267) 1(-19.463,6.172) 1(-17.742,4.267) 1(-17.742,6.172) 1(-16.021,4.267) 1(-16.021,6.172) 1(-14.3,4.267) 1(-14.3,6.172) 1(-12.579,4.267) 1(-12.579,6.172) 1(-10.858,4.267) 1(-10.858,6.172) 1(-9.138,4.267) 1(-9.138,6.172) 1(-7.417,6.172)
  rrect50% 15x3 smd: 1(-14.3,5.2)
  rrect50% 15x3 smd far side: 1(-14.3,5.2) 1(-14.3,-5.2)
  round 0 all layers, no hole: 1(-7.417,4.267)
  rrect50% 5x7 smd: 1(0,0)
  body extent -21.78,-3.78 1.22,3.72, height 3.75
ZQFN-4L_L1.0-W1.0-P0.63-BL-EP [mm]
  round 0.06 smd mask+0.102: 1(-0.313,-0.325) 2(0.313,-0.325) 3(0.313,0.325) 4(-0.313,0.325)
  rect 0.5x0.5 smd rot 45 mask-2539.97: 5(0,0)
  Top Layer 1 region: -0.163,-0.525 -0.463,-0.525 -0.463,-0.125 -0.163,-0.425 -0.163,-0.525
  Top Layer 1 region: 0.163,0.525 0.463,0.525 0.463,0.175 0.413,0.175 0.163,0.425 0.163,0.525
  Top Layer 1 region: -0.463,0.175 -0.463,0.525 -0.163,0.525 -0.163,0.475 -0.163,0.425 -0.413,0.175 -0.463,0.175
  Top Layer 1 region: 0.463,-0.175 0.463,-0.525 0.163,-0.525 0.163,-0.425 0.413,-0.175 0.463,-0.175
  silkscreen extent -0.83,-0.7 0.66,0.7, body extent -0.5,-0.5 0.5,0.5, height 0.4
贴片排母2.54mm_交错_8P [mm] "贴片排母2.54mm_交错_8P"
  rect 1.27x2.2 smd: 1(0,0) 2(2.54,-3.6) 3(5.08,0) 4(7.62,-3.6) 5(10.16,0) 6(12.7,-3.6) 7(15.24,0) 8(17.78,-3.6)
  silkscreen extent -1.42,-3.07 19.05,0.89, body extent -1.5,-4.24 19.32,0.66, height 5.3

## Part data
C1 C2 C3 C4 C5 C6 C7 C8 C9 C14 C19 C22 C34 C35 C36 C37 C38 C39 C40 C41 C42 C43 C44 C45 C46 C47 C48 C49: library part C-MLCC, "独石电容", BOM名称=独石电容, 学习资源=www.ooocke.com, 版权归属=源创客
C10 C11 C12 C15 C16 C17 C18 C20 C21 C23 C24 C25 C26 C27 C28 C29 C30 C31 C32 C33 C?: library part C, "无极性贴片电容", BOM名称=无极性贴片电容, 学习资源=www.ooocke.com, 材质=X7R, 版权归属=源创客
D1 D2 D7: "快恢复整流二极管", BOM名称=快恢复二极管, 学习资源=www.ooocke.com, 属性=700V/1A, 版权归属=源创客
D3 D4 D5 D6 D8 D9: "高速开关二极管", BOM名称=高速开关二极管, 学习资源=www.ooocke.com, 版权归属=源创客
D?: library part 1N4148, "高速开关二极管", BOM名称=高速开关二极管, 学习资源=www.ooocke.com, 版权归属=源创客
E1: library part C-CD, "贴片钽电容", BOM名称=贴片钽电容, 学习资源=www.ooocke.com, 版权归属=源创客
JP1 JP2 JP3 JP6: library part "Header 8", "8P接插件", BOM名称=8P接插件, 学习资源=www.ooocke.com, 版权归属=源创客
JP4: library part "Header 4", "4P接插件", BOM名称=4P接插件, 学习资源=www.ooocke.com, 版权归属=源创客
JP5: library part "Header 6", "6P接插件", BOM名称=6P接插件, 学习资源=www.ooocke.com, 版权归属=源创客
L1 L2: library part L, "小功率贴片电感", BOM名称=小功率贴片电感, 学习资源=www.ooocke.com, 版权归属=源创客
LB1: library part LB, "磁珠", BOM名称=磁珠, 学习资源=www.ooocke.com, 版权归属=源创客
OPA1: "4路运放 14 引脚 X2QFN", BOM名称=4路运放, 学习资源=www.ooocke.com, 版权归属=源创客
OPA2: "TLV9061 DPW单路运放"
R1 R2 R3 R4 R5 R6 R7 R8 R9 R10 R11 R12 R13 R14 R15 R16 R17 R18 R19 R20 R21 R22 R23 R24 R25 R26 R27 R28 R29 R30 R31 R32 R33 R34 R35 R36 R37 R38 R39 R40 R41 R42 R43 R44 R45 R46 R47 R48 R49 R50 R51 R52 R53 R54 R55 R56 R57 R58 R59 R60 R61 R62 R63 R64 R65: library part R, "贴片电阻", BOM名称=贴片电阻, 学习资源=www.ooocke.com, 版权归属=源创客
U1 U3: "与SOT-23-5符号不同！！！！！"
U2: "BUCK"
U5: "DCDC降压芯片 最大电压100V 最大电流1A"
U6 U7 U8: library part EG3113, "栅极驱动"
U9: "RS485/RS422收发器"
Y1: library part Crystal

## Via types
v1: diameter 0.4, hole 0.3, Top Layer 1 to Bottom Layer 1, tented both sides, 372 vias
v2: diameter 1, hole 0.711, Top Layer 1 to Bottom Layer 1, tented both sides, 120 vias

## Nets (pads, with @x,y where several pads share a name; then routed paths per layer and width w, separated by ;. In a path a pad name is that pad's centre, name@x,y a point inside that pad or via, vN(x,y) a via of type N, cw(c..) or ccw(c..) an arc to the next point about the centre after c; other vN are vias at no path point)
ADC2_IN3: C36.2 R51.1 U4.14 | length 21.8
  Top Layer 1 w0.203: v1(38.735,10.795) 38.74,10.8 39.487,10.8 U4.14@39.492,10.806 ; v1(55.651,7.872) 55.651,7.276 R51.1@55.626,7.251 57.046,7.251 C36.2@57.111,7.315
  Bottom Layer 1 w0.203: v1@38.786,10.82 38.811,10.795 54.026,10.795 55.651,9.169 v1(55.651,7.872)
ADC2_IN4: C37.2 R56.1 U4.15 | length 23.2
  Top Layer 1 w0.203: U4.15@39.492,11.306 39.503,11.317 40.324,11.317 v1(40.335,11.328) ; v1(55.626,17.427) R56.1@55.626,18.048 57.046,18.048 C37.2@57.111,17.983
  Bottom Layer 1 w0.203: v1@40.488,11.328 53.873,11.328 55.626,13.081 v1(55.626,17.427)
ADC2_IN5: C34.2 R41.1 U4.16 | length 21.8
  Top Layer 1 w0.203: v1(38.735,11.811) 38.738,11.808 39.489,11.808 U4.16@39.492,11.806 ; C34.2@51.246,17.983 51.285,18.022 R41.1@52.73,18.022 52.705,17.997 v1(52.705,17.401)
  Bottom Layer 1 w0.203: v1@38.76,11.811 51.638,11.811 52.705,12.878 v1(52.705,17.401)
ADC2_IN13: C35.2 R46.1 U4.13 U4.18 | length 21.6
  Top Layer 1 w0.203: U4.13@39.275,10.306 38.594,10.306 38.151,10.749 38.151,12.471 38.485,12.806 U4.18@39.492,12.806 ; U4.13@39.492,10.306 39.495,10.309 40.332,10.309 v1(40.335,10.312) ; C35.2@51.246,7.315 52.666,7.315 R46.1@52.705,7.276 ; v1(52.705,7.872) R46.1@52.705,7.276 ; R46.1@52.73,7.251 R46.1@52.705,7.276
  Bottom Layer 1 w0.203: v1(40.335,10.312) 51.613,10.312 52.705,9.22 v1(52.705,7.872)
ADC_VBUS: C?.2 D?.2 R4.2 R6.1 U4.17 | length 95.9
  Top Layer 1 w0.203: U4.17@39.492,12.306 39.499,12.312 40.227,12.312 v1(40.234,12.319)
  Top Layer 1 w0.381: D?.2@88.494,50.422 90.388,50.422 90.486,50.521 ; C?.2@90.486,47.498 v1(90.486,48.235) R6.1@90.486,49.505 90.486,50.521 ; R4.2@90.486,51.537 90.486,50.521
  Bottom Layer 1 w0.203: v1(40.234,12.319) 40.234,13.484 40.973,14.224 45.11,14.224 47.625,16.739 47.625,19.863 48.184,20.422 92.532,20.422 93.878,21.768 93.878,46.838 92.481,48.235 v1(90.486,48.235)
AGND: C14.2 C34.1 C35.1 C36.1 C37.1 C38.1 C47.1 C48.1 C49.2 OPA1.10 OPA2.3 R60.2 | length 19.8
  Top Layer 1 w0.152: OPA2.3@67.412,16.205 v1(67.412,16.993)
  Top Layer 1 w0.203: v1(54.127,12.649) v1(57.861,12.649)
  Top Layer 1 w0.254: v1(63.678,14.475) 64.296,14.475 C38.1@64.299,14.478 ; v1(63.678,17.904) 64.296,17.904 R60.2@64.299,17.907
  Top Layer 1 w0.381: C48.1@43.817,13.767 C48.1@43.82,13.764 ; C14.2@43.823,9.525 43.823,12.979 43.82,12.982 C48.1@43.82,13.764 ; C47.1@43.829,12.217 43.832,12.22 v1(44.453,12.22) ; v1(44.444,13.767) 43.823,13.767 C48.1@43.82,13.764 ; v1(44.45,7.95) 44.446,7.954 43.876,7.954 C49.2@43.829,8.001 43.827,8.002 43.827,8.764 v1(43.826,8.766) 43.826,9.522 C14.2@43.829,9.525 v1(44.45,9.525) ; C35.1@49.796,7.315 49.816,7.336 v1(50.413,7.336) ; C34.1@49.796,17.983 49.817,17.961 50.413,17.961 v1(50.417,17.958) ; v1(57.94,7.315) C36.1@58.561,7.315 ; v1(57.94,17.983) C37.1@58.561,17.983 ; C38.1@64.299,14.478 64.346,14.431 64.916,14.431 v1(64.92,14.427) ; R60.2@64.299,17.907 v1(64.92,17.907)
  Top Layer w0.381: 65.405,16.205 67.412,16.205
BOOT0: R63.2 U4.46 | length 6
  Top Layer 1 w0.203: R63.2@29.656,15.113 29.656,15.063 29.929,14.79 30.435,14.79 30.836,14.389 30.836,11.72 31.25,11.306 U4.46@32.492,11.306
COMP1_OUT: R65.1 U4.8 | length 10
  Top Layer 1 w0.203: R65.1@28.206,10.516 v1(28.827,10.516) ; v1(36.17,10.947) 36.207,10.91 36.512,10.91 36.742,10.68 U4.8@36.742,9.556
  Top Layer w0.203: v1(28.827,10.516) 29.258,10.947 v1(36.17,10.947)
GND: C2.1 C3.1 C4.1 C5.1 C6.1 C8.2 C9.1 C11.1 C12.1 C14.1 C15.1 C16.1 C17.1 C18.1 C19.2 C20.1 C21.1 C22.1 C23.2 C24.2 C29.1 C30.1 C33.1 C39.2 C40.1 C41.1 C42.1 C43.1 C44.1 C45.1 C46.1 C49.1 C?.1 D?.1 E1.2 JP4.0@19.974,2.355 JP4.2 JP5.0 JP5.2 JP6.0 JP6.2 LB1.2 R2.2 R5.2 R6.2 R11.2 R12.2 R13.2 R17.2 R18.2 R27.1 R28.1 R32.2 R37.1 R63.1 U1.2 U1.5 U2.3 U2.4 U2.5 U2.11 U3.2 U3.5 U4.49 U5.1 U5.9 U6.4 U7.4 U8.4 U9.5 U9.9 Y1.2 Y1.4 | length 97.7
  Top Layer 1 w0.203: v1(14.703,4.066) JP4.2@14.703,5.166 JP4.2@14.703,5.166 ; v1(26.117,4.066) JP5.2@26.117,5.166 JP5.2@26.118,5.167 ; v1(39.98,4.089) 39.98,5.16 JP6.2@39.985,5.166 ; U9.5@58.131,2.251 58.136,2.256 58.692,2.256 v1(58.697,2.261) ; R13.2@65.938,5.971 U2.11@68.536,5.971 ; U2.5@68.012,7.339 68.012,6.496 U2.11@68.536,5.971 ; U2.4@68.512,7.339 68.512,6.328 U2.11@68.869,5.971 ; U2.3@69.012,7.339 U2.11@69.012,5.846 ; R12.2@72.009,5.946 69.111,5.946 U2.11@69.012,5.846 ; U2.11@68.536,5.971 U2.11@68.869,5.971 ; U2.11@68.869,5.971 U2.11@69.003,5.837 U2.11@69.012,5.846
  Top Layer 1 w0.254: v1(11.275,22.987) 10.68,22.987 R17.2@10.654,23.012 10.641,23.025 10.641,23.762 v1(10.629,23.774) 10.641,23.787 10.641,24.524 10.654,24.536 v1(11.275,24.536) ; v1(14.986,28.141) C29.1@14.986,27.497 14.993,27.49 15.665,27.49 v1(15.672,27.483) ; v1(15.748,7.941) 15.748,8.537 C40.1@15.773,8.562 ; v1(17.323,7.966) C39.2@17.323,8.562 C39.2@17.348,8.587 ; v1(20.345,22.073) U6.4@20.345,23.343 ; v1(21.426,7.578) 22.044,7.578 C24.2@22.047,7.581 ; v1(23.715,6.635) 23.715,7.253 Y1.4@23.712,7.256 23.715,7.259 v1(24.333,7.259) ; v1(24.791,9.353) 25.409,9.353 Y1.2@25.412,9.356 25.409,9.359 v1(25.409,9.977) ; C23.2@27.229,9.031 27.232,9.034 v1(27.85,9.034) ; v1(28.169,17.323) 28.187,17.304 28.187,16.655 28.213,16.63 28.2,16.617 28.2,15.881 v1(28.194,15.875) 28.2,15.869 28.2,15.119 R63.1@28.206,15.113 28.2,15.107 28.2,14.331 v1(28.194,14.326) 28.206,14.314 28.206,13.575 C43.1@28.217,13.564 28.209,13.555 28.209,12.804 v1(28.2,12.796) 28.2,12.045 C44.1@28.206,12.04 28.213,12.033 v1(28.213,11.401) ; v1(41.732,7.976) 42.353,7.976 C49.1@42.379,8.001 ; v1(41.732,9.5) 42.353,9.5 C14.1@42.373,9.519 ; v1(43,7.976) 42.404,7.976 C49.1@42.379,8.001 ; v1(43,9.5) 42.404,9.5 C14.1@42.379,9.525 C14.1@42.373,9.519 ; v1(43.815,14.646) v1(43.815,14.646) 43.816,15.315 C46.1@43.817,15.316 ; v1(43.926,23.012) 43.33,23.012 R18.2@43.305,23.038 43.292,23.05 43.292,23.787 v1(43.279,23.8) 43.292,23.812 43.292,24.549 43.305,24.562 v1(43.926,24.562) ; v1(47.498,28.223) 47.498,27.573 C30.1@47.523,27.547 47.529,27.553 48.203,27.553 v1(48.209,27.559) ; v1(52.397,23.216) 52.781,23.216 U7.4@52.908,23.343 ; C21.1@64.392,2.508 64.395,2.505 v1(64.395,1.887) ; v1(67.197,14.461) 67.815,14.461 C22.1@67.818,14.465 67.831,14.478 v1(68.439,14.478) ; v1(67.205,17.919) 67.823,17.919 C19.2@67.826,17.922 ; v1(67.437,1.679) 67.437,1.061 C20.1@67.44,1.058 ; v1(67.826,18.54) C19.2@67.826,17.922 ; v1(68.451,17.907) 67.842,17.907 C19.2@67.83,17.919 C19.2@67.826,17.922 ; v1(68.961,1.679) 68.961,1.061 R11.2@68.964,1.058 ; v1(70.089,17.919) 70.707,17.919 C8.2@70.71,17.922 ; v1(70.093,14.461) 70.71,14.461 C9.1@70.714,14.465 70.727,14.478 v1(71.335,14.478) ; v1(70.71,18.54) C8.2@70.71,17.922 ; v1(71.335,17.907) 70.726,17.907 C8.2@70.714,17.919 C8.2@70.71,17.922 ; v1(74.131,4.504) C5.1@74.749,4.504 ; v1(74.752,3.883) 74.752,4.501 C5.1@74.749,4.504 ; C18.1@76.138,12.319 C18.1@76.141,12.322 ; v1(76.356,3.873) 76.356,4.49 76.351,4.495 v1(75.565,4.496) 75.559,4.502 74.758,4.502 C5.1@74.752,4.507 C5.1@74.749,4.504 ; v1(76.592,22.962) 75.997,22.962 R32.2@75.971,22.987 75.959,23 75.959,23.736 v1(75.946,23.749) 75.959,23.762 75.959,24.498 R37.1@75.971,24.511 v1(76.592,24.511) ; v1(76.759,12.322) C18.1@76.141,12.322 ; v1(76.759,13.872) 76.141,13.872 76.131,13.861 76.131,13.088 v1(76.124,13.081) 76.131,13.074 76.131,12.332 C18.1@76.141,12.322 ; R5.2@78.23,15.443 78.233,15.446 v1(78.851,15.446) ; v1(80.213,28.07) 80.213,27.436 80.216,27.433 v1(80.95,27.432) v1(80.95,27.432) ; v1(85.038,23.216) 85.422,23.216 U8.4@85.549,23.343 ; R2.2@86.778,16.993 86.781,16.996 v1(87.399,16.996) ; D?.1@88.494,47.622 88.494,47.522 89.171,46.844 91.333,46.844 91.936,47.448 C?.1@91.936,47.498 91.942,47.504 91.942,48.737 v1(91.948,48.743) 91.942,48.748 91.942,49.499 R6.2@91.936,49.505 ; C2.1@90.493,11.474 C2.1@90.551,11.416 ; C14.1@42.373,9.519 42.373,8.769 42.376,8.766 42.376,8.004 C49.1@42.379,8.001
  Top Layer 1 w0.381: U3.2@68.856,16.528 68.856,16.52 v1(69.173,16.203) ; U1.2@71.747,16.53 71.747,16.522 v1(72.063,16.205)
  Top Layer 1 w0.508: U5.1@87.74,11.532 87.761,11.511 90.457,11.511 C2.1@90.493,11.474 ; C2.1@90.551,11.416 95.188,11.416 E1.2@95.225,11.453 95.225,9.5
  Top Layer w0.381: v1(91.948,48.743) 94.132,46.558 94.132,29.386
  other v1: 19.195,1.078 19.957,1.078 20.77,1.078 22.107,1.078 22.92,1.078 33.109,1.078 33.871,1.078 34.684,1.078 35.976,1.078 36.788,1.078 49.478,1.078 50.24,1.078 51.052,1.078 89.865,1.168 90.576,1.168 91.313,1.168 92.024,1.168 77.826,1.629 78.537,1.629 79.324,1.679 80.035,1.679 80.848,1.679 81.559,1.679 89.51,1.676 90.221,1.676 90.957,1.676 91.669,1.676 56.18,2.316 57.247,2.316 79.68,2.391 79.68,3.102 56.18,3.231 57.247,3.231 19.177,3.632 19.99,3.632 21.327,3.632 22.14,3.632 22.902,3.632 33.091,3.632 33.904,3.632 35.195,3.632 36.008,3.632 36.77,3.632 49.459,3.632 50.272,3.632 51.034,3.632 56.18,4.145 57.247,4.145 68.961,5.283 68.021,5.309 68.478,5.842 68.021,6.401 68.961,6.401 79.146,7.239 79.146,7.95 90.907,8.103 91.618,8.103 92.354,8.103 64.237,8.433 64.948,8.433 65.735,8.484 66.446,8.484 67.259,8.484 67.97,8.484 89.84,8.636 90.551,8.636 91.288,8.636 91.999,8.636 79.146,8.763 77.368,9.093 78.08,9.093 90.195,9.169 90.907,9.169 91.643,9.169 92.354,9.169 93.066,9.169 93.802,9.169 94.513,9.169 66.091,9.195 79.146,9.474 89.84,9.728 90.551,9.728 91.288,9.728 91.999,9.728 92.71,9.728 93.447,9.728 94.158,9.728 66.091,9.906 79.146,10.262 79.146,10.973 35.941,11.811 36.601,11.811 37.236,11.811 86.157,11.938 84.074,11.963 85.09,11.963 35.916,13.081 36.576,13.081 37.211,13.081 84.074,13.437 85.115,13.437 86.157,13.437 35.916,14.3 36.576,14.3 37.211,14.3 84.074,14.935 85.115,14.935 86.157,14.935
HO-U: D3.1 JP1.8 R21.2 | length 32.6
  Top Layer 1 w0.381: JP1.8@7.207,41.402 16.365,41.402 17.221,40.546 17.221,31.953 17.899,31.275 26.414,31.275 27,30.689 27,29.54 R21.2@26.848,29.388 26.797,29.337 25.273,29.337 D3.1@25.222,29.286 D3.1@25.013,29.496
  other v1: 6.594,40.97 8.02,40.97 6.595,41.834 8.02,41.834
HO-V: D4.1 JP2.8 R22.2 | length 31.8
  Top Layer 1 w0.381: JP2.8@39.922,41.427 48.743,41.427 49.86,40.31 49.86,32.055 50.673,31.242 58.94,31.242 59.411,30.772 R22.2@59.411,29.362 59.36,29.312 57.836,29.312 D4.1@57.785,29.261
  other v1: 39.31,40.996 40.735,40.996 39.31,41.859 40.735,41.859
HO-W: D8.1 JP3.8 R34.2 | length 30
  Top Layer 1 w0.381: JP3.8@72.561,41.402 73.026,41.402 74.804,39.624 81.356,39.624 82.652,38.329 82.652,33.045 84.353,31.344 91.389,31.344 92.05,30.683 R34.2@92.05,29.374 91.999,29.323 90.475,29.323 D8.1@90.424,29.272
  other v1: 71.949,40.97 73.374,40.97 71.949,41.834 73.374,41.834
LO-U: D5.1 JP1.4 R29.2 | length 23.2
  Top Layer 1 w0.381: JP1.4@7.207,31.242 12.296,31.242 12.706,30.832 12.706,29.224 13.93,27.999 13.93,27.122 14.223,26.829 16.871,26.829 17.179,27.137 17.179,29.86 17.622,30.302 21.055,30.302 21.971,29.386 D5.1@21.971,29.286 ; D5.1@22.022,29.337 23.546,29.337 R29.2@23.597,29.388
  other v1: 6.594,30.81 8.02,30.81 6.595,31.674 8.02,31.674
LO-V: D6.1 JP2.4 R30.2 | length 22.8
  Top Layer 1 w0.381: JP2.4@39.922,31.267 44.865,31.267 45.449,30.683 45.449,29.049 46.457,28.042 46.457,27.235 46.818,26.873 49.289,26.873 49.733,27.318 49.733,29.851 50.121,30.239 53.659,30.239 54.583,29.314 54.583,29.313 56.11,29.313 R30.2@56.159,29.362
  other v1: 39.31,30.836 40.735,30.836 39.31,31.699 40.735,31.699
LO-W: D9.1 JP3.4 R38.2 | length 23.3
  Top Layer 1 w0.381: JP3.4@72.561,31.242 77.675,31.242 78.105,30.812 78.105,29.058 79.173,27.99 79.173,27.058 79.484,26.746 82.123,26.746 82.369,26.992 82.369,29.89 82.779,30.3 86.235,30.3 D9.1@87.217,29.319 ; D9.1@87.173,29.275 D9.1@87.217,29.319 ; R38.2@88.798,29.374 88.749,29.324 87.222,29.324 D9.1@87.217,29.319
  other v1: 71.949,30.81 73.374,30.81 71.949,31.674 73.374,31.674
Motor-U: Hole3.1 J3.1
  other v2: 26,33 28,33 30,33 32,33 27,34 29,34 31,34 33,34 28,35 30,35 32,35 34,35 27,36 29,36 31,36 33,36 26,37 28,37 30,37 32,37 34,37 25,38 27,38 29,38 31,38 33,38 28,39 30,39 32,39 34,39 19,40 21,40 23,40 25,40 27,40 29,40 31,40 33,40 20,41 22,41 24,41 26,41 28,41 19,42 21,42 23,42 25,42 27,42 20,43 22,43 24,43 26,43 28,43 21,44 23,44 25,44 27,44 22,45 24,45 26,45 28,45
Motor-V: Hole4.1 J4.1
  other v2: 58,33 60,33 59,34 61,34 58,35 60,35 59,36 61,36 58,37 60,37 59,38 61,38 52,39 54,39 56,39 58,39 60,39 53,40 55,40 57,40 59,40 61,40 52,41 54,41 53,42 52,43 54,43 53,44 52,45 54,45
Motor-W: Hole5.1 J5.1 | length 4.4
  Top Layer 1 w0.203: J5.1@80.652,43.104 80.756,43 v2(85,43)
  other v2: 91,33 91,35 91,37 90,38 85,39 87,39 89,39 91,39 86,40 88,40 90,40 85,41 87,41 89,41 91,41 86,42 88,42 90,42 87,43 89,43 91,43 86,44 88,44 90,44 85,45 87,45 89,45 91,45
NetC1_1: C1.1 L1.1 U5.8 | length 2.2
  Top Layer 1 w0.381: C1.1@80.391,8.317 82.587,8.317 82.601,8.331
NetC1_2: C1.2 U5.7 | length 4.6
  Top Layer 1 w0.381: C1.2@80.391,9.767 80.391,11.862 81.331,12.802 U5.7@82.49,12.802
NetC7_1: C7.1 R1.2 R5.1 U5.5 | length 5.8
  Top Layer 1 w0.203: C7.1@79.68,12.344 R5.1@79.68,15.443 ; R5.1@79.781,15.342 U5.5@82.49,15.342
NetC10_1: C10.1 L2.1 U2.2 | length 8.8
  Top Layer 1 w0.203: v1(69.504,8.068) 69.508,8.064 69.508,7.343 U2.2@69.512,7.339 ; v1(72.009,1.679) 72.009,1.061 C10.1@72.012,1.058
  Bottom Layer 1 w0.381: v1(69.504,8.068) 69.504,4.185 v1(72.009,1.679)
NetC10_2: C10.2 U2.9 | length 3.7
  Top Layer 1 w0.203: U2.9@69.512,4.339 69.512,3.568 69.816,3.264 71.206,3.264 71.962,2.508 C10.2@72.012,2.508
NetC20_2: C20.2 R9.1 U2.7 | length 3.7
  Top Layer 1 w0.203: R9.1@65.916,2.508 C20.2@67.44,2.508 C20.2@67.49,2.508 ; C20.2@67.691,2.591 67.691,2.709 68.512,3.53 U2.7@68.512,4.339
NetC21_2: C21.2 R9.2 | length 1.5
  Top Layer 1 w0.203: C21.2@64.392,1.058 R9.2@65.916,1.058
NetC25_2: C25.2 C27.2 D1.2 U6.8 | length 9
  Top Layer 1 w0.381: C27.2@11.147,33.195 13.437,33.195 C25.2@13.585,33.195 13.585,30.168 D1.2@14.529,29.224 16.43,29.224 16.535,29.118 U6.8@16.535,28.931
NetC26_2: C26.2 C28.2 D2.2 U7.8 | length 8.9
  Top Layer 1 w0.381: C26.2@43.815,33.096 C28.2@46.279,33.096 46.279,30.26 47.155,29.383 D2.2@47.155,29.312 48.993,29.312 49.098,29.206 U7.8@49.098,28.931
NetC31_2: C31.2 C32.2 D7.2 U8.8 | length 8.9
  Top Layer 1 w0.381: C32.2@76.505,33.195 C31.2@78.943,33.195 78.943,30.08 79.847,29.176 D7.2@79.847,29.159 81.634,29.159 81.739,29.054 U8.8@81.739,28.931